# Altium PCB УШЯИ.411618.029Э.pcbdoc (part 1 of 6)
Units mil, origin at the board's own origin, x right, y up, seen from the top; angles counter-clockwise.
Board outline 13385.8 x 6692.9 mil, 4 copper layers (Top Layer, Supply, GND, Bottom Layer), stack 62.3 mil thick; 637 components, 474 nets, 1978 pads, 458 vias.
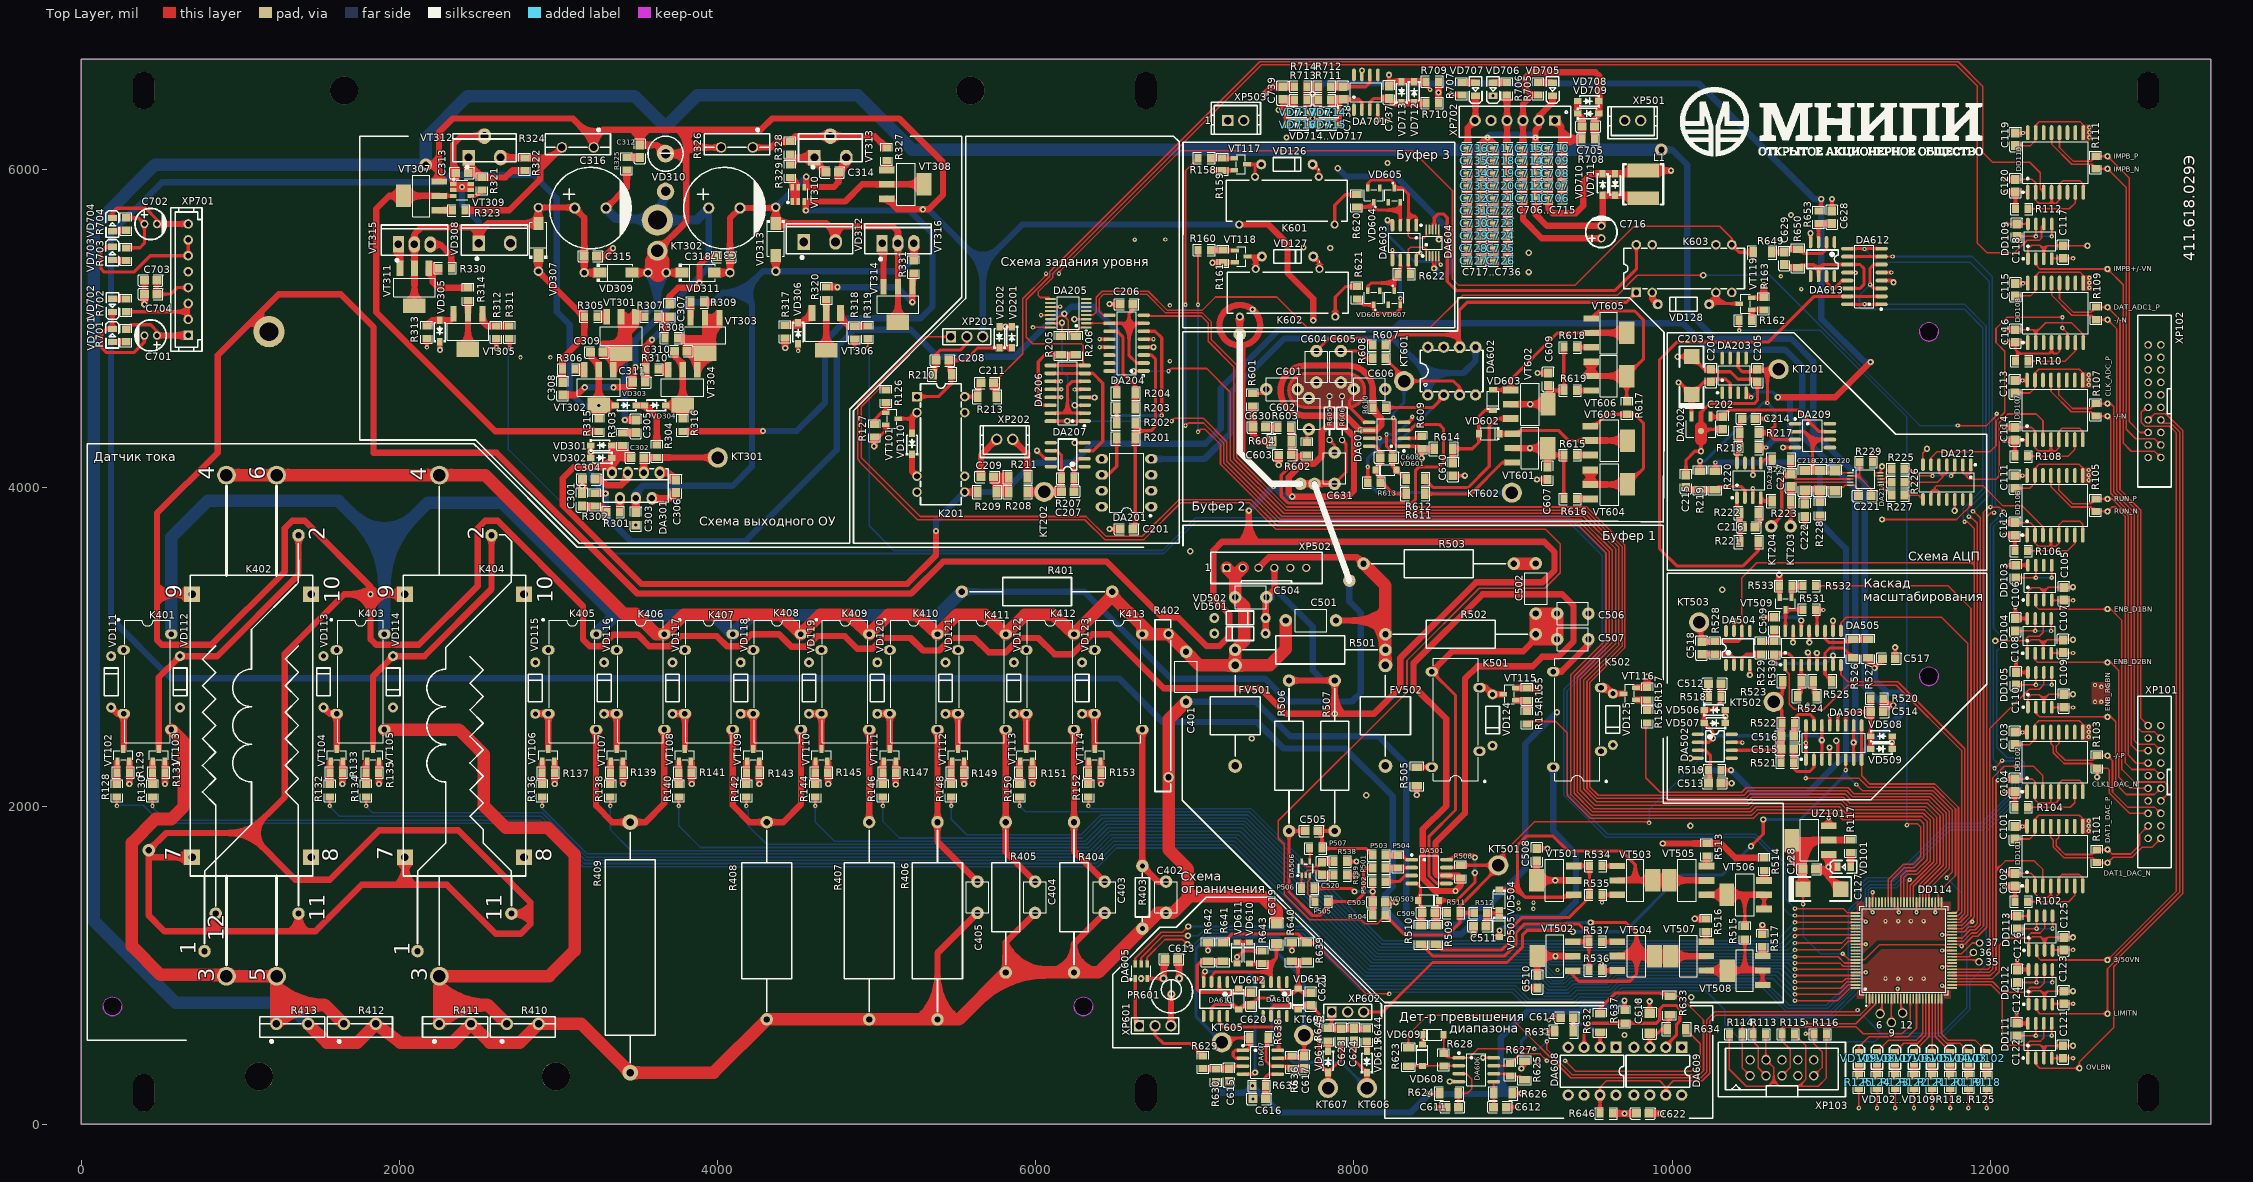
[diagram p0: Top Layer view]
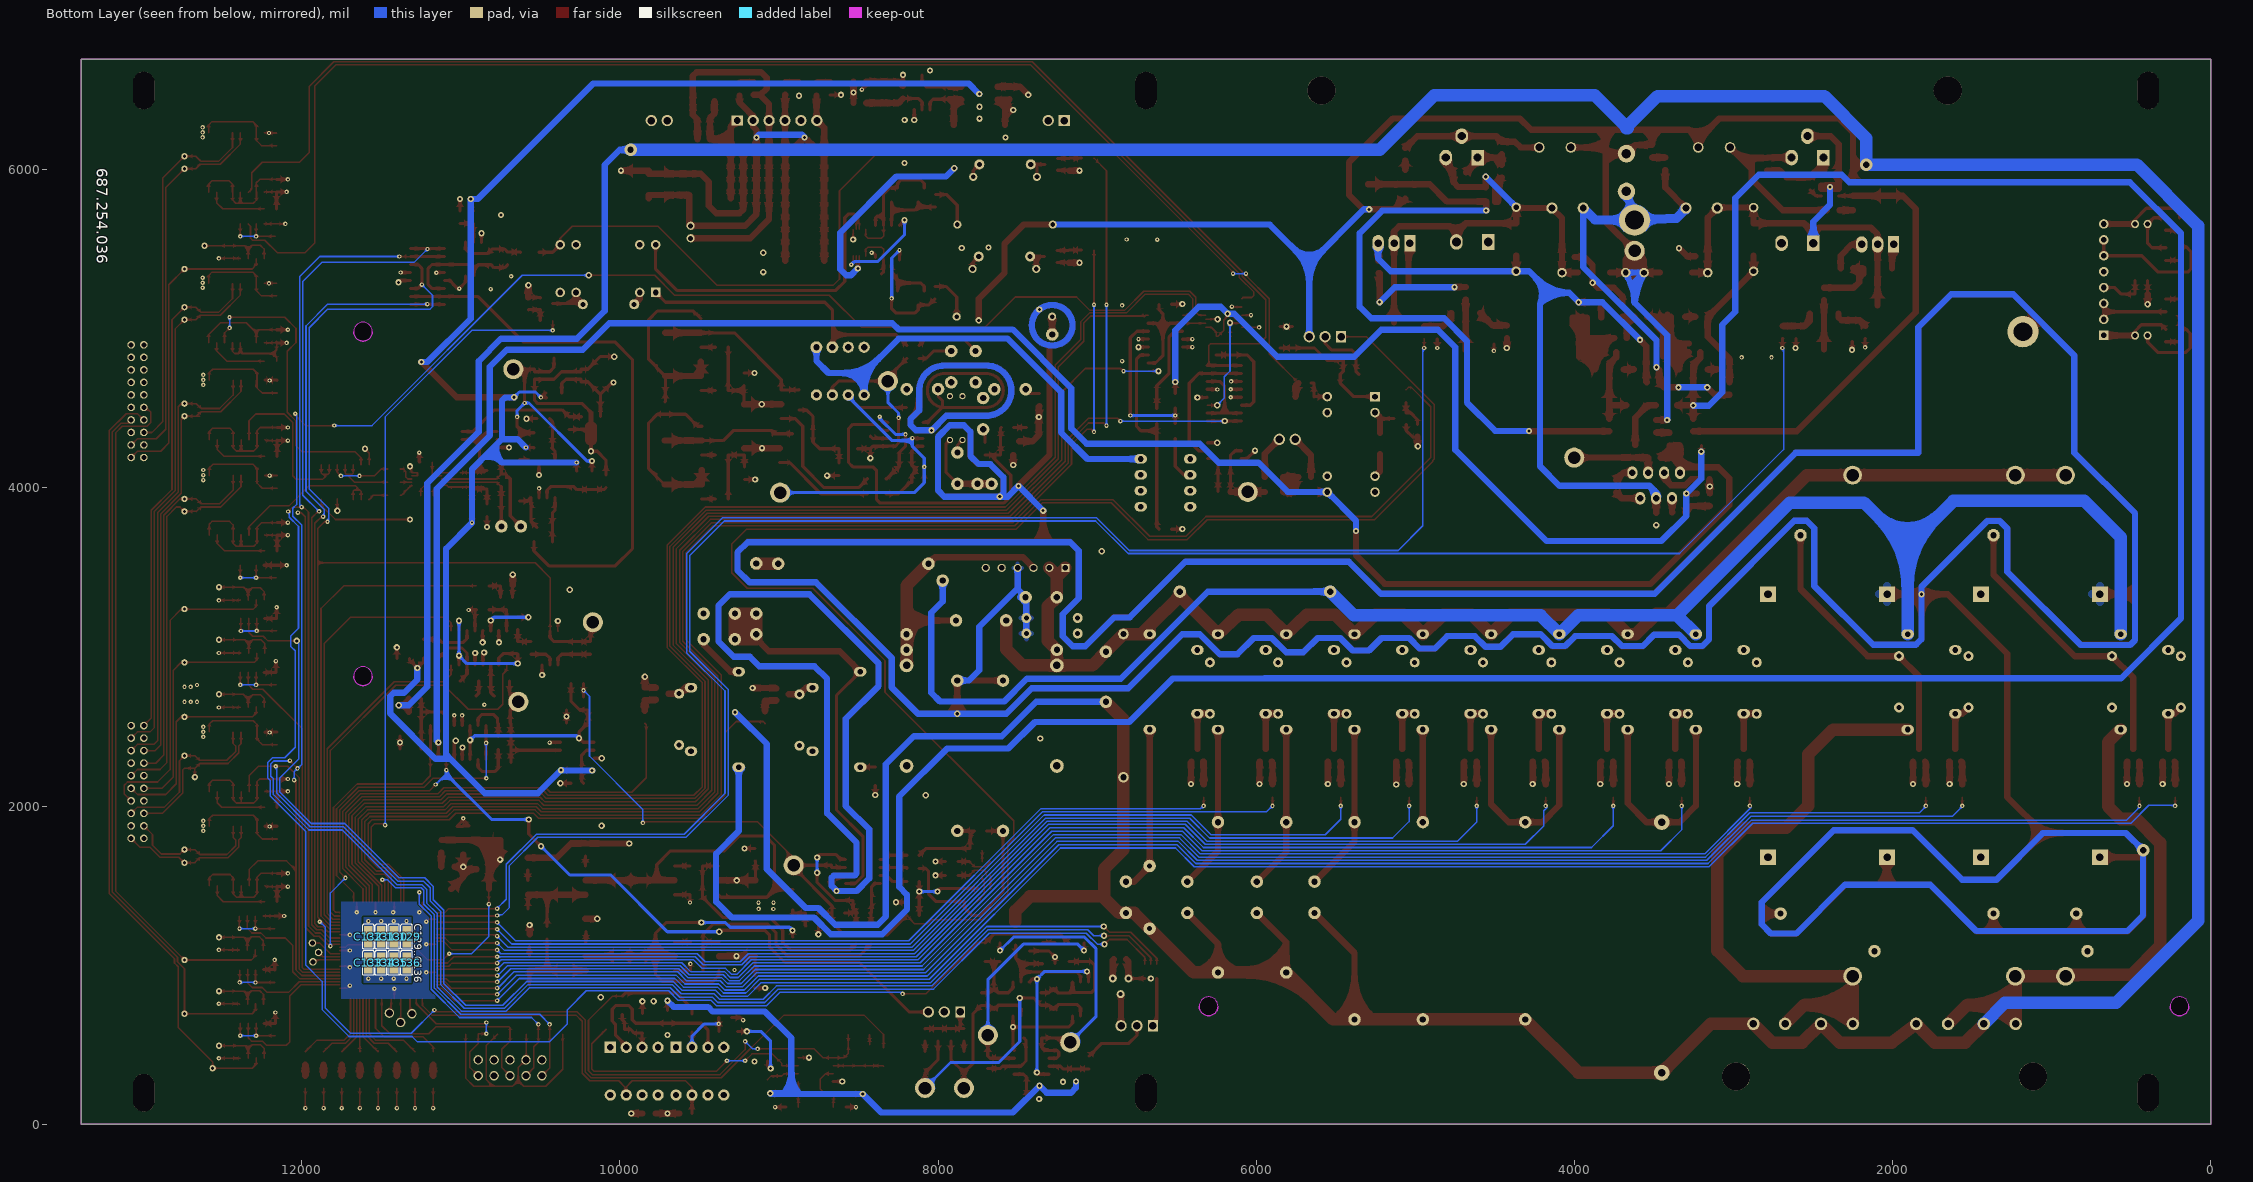
[diagram p1: Bottom Layer view, seen from below]
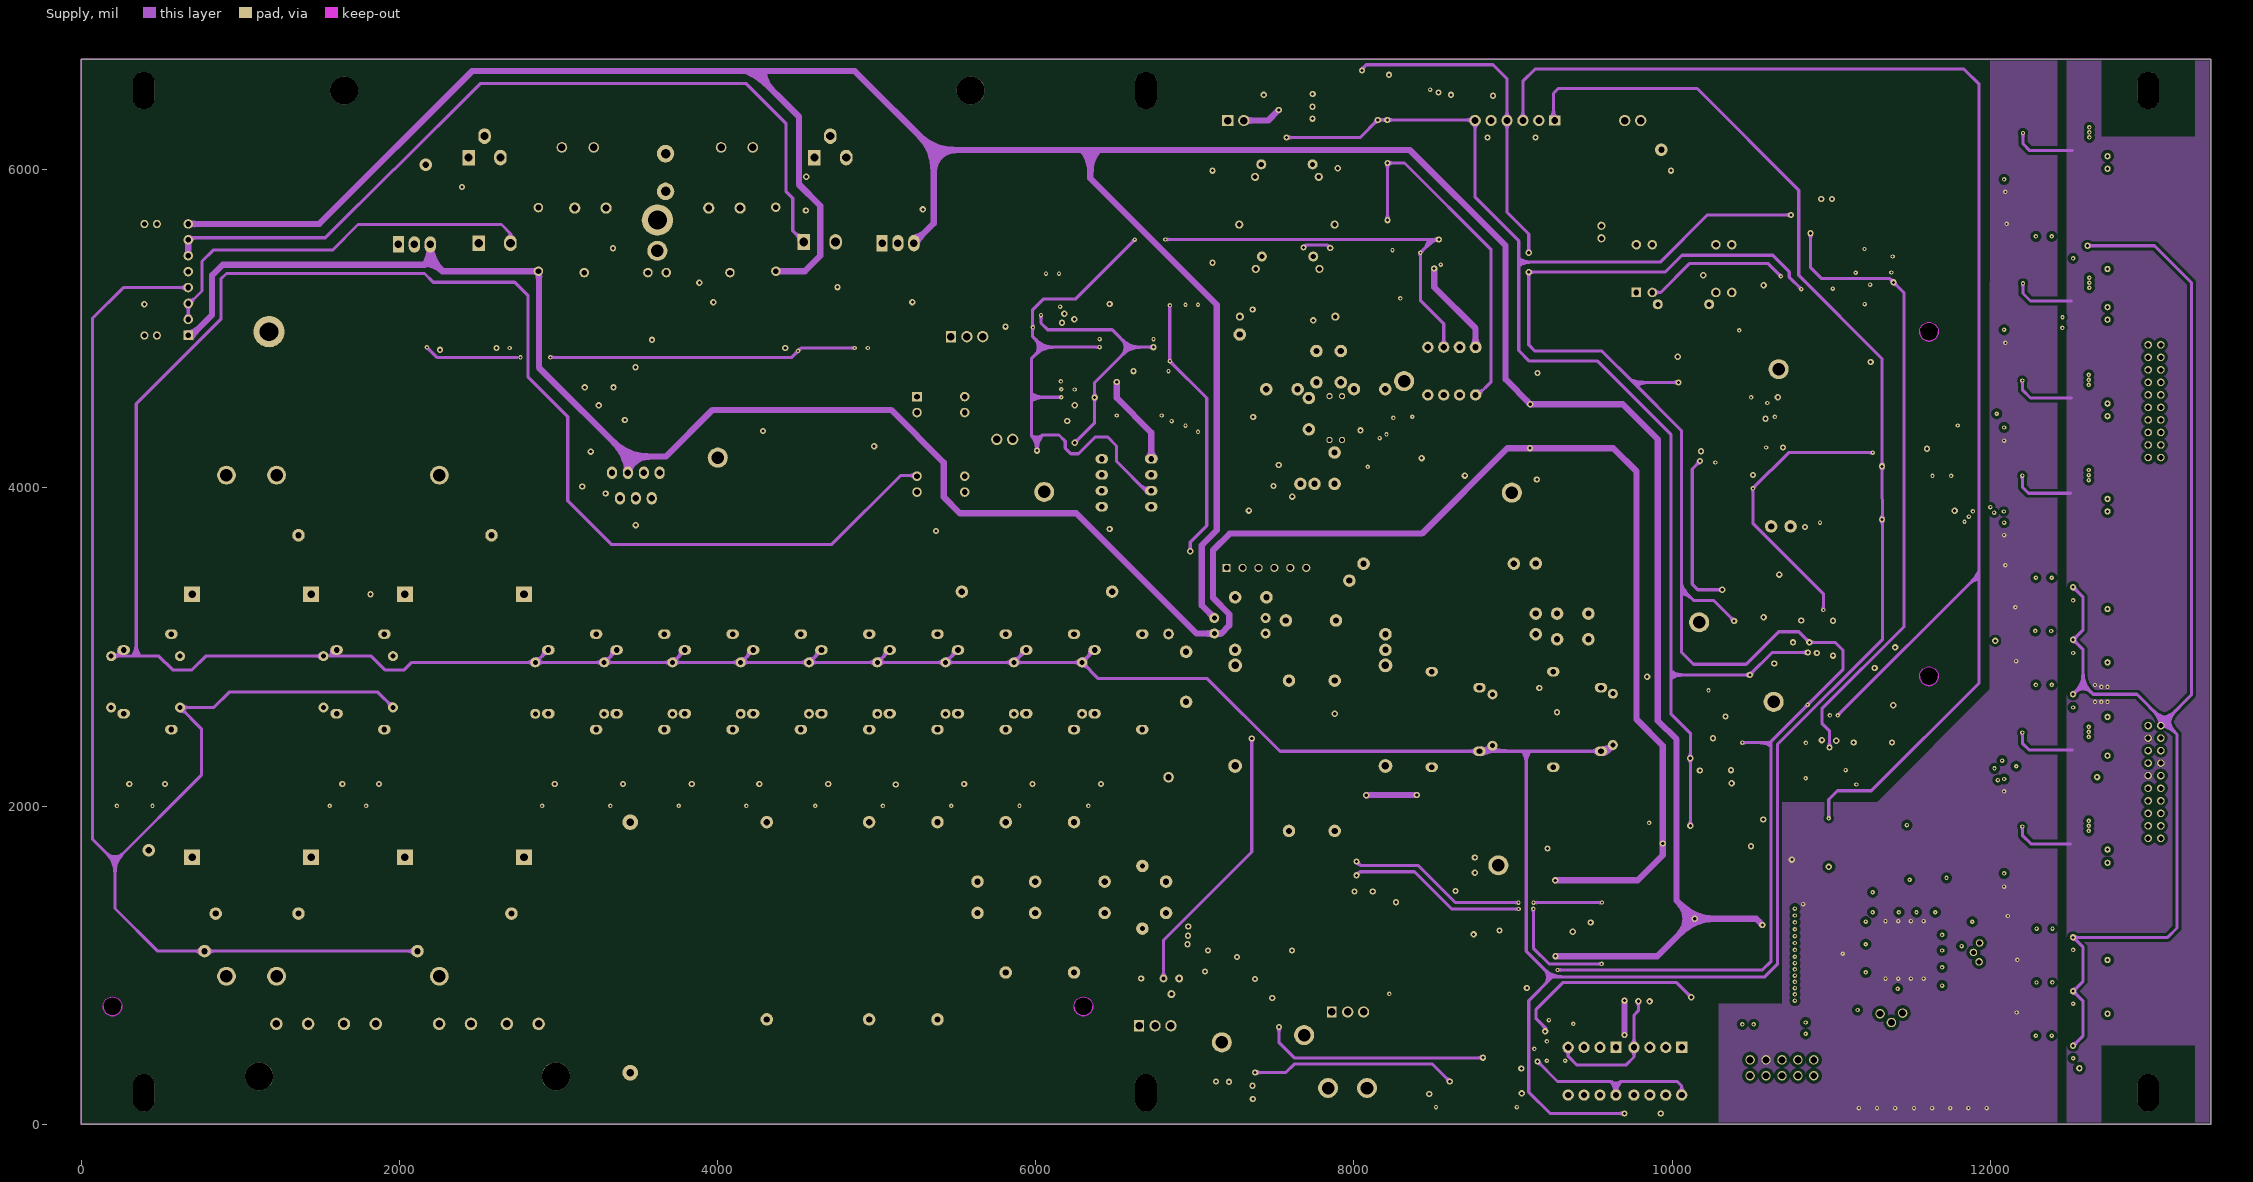
[diagram p2: Supply]
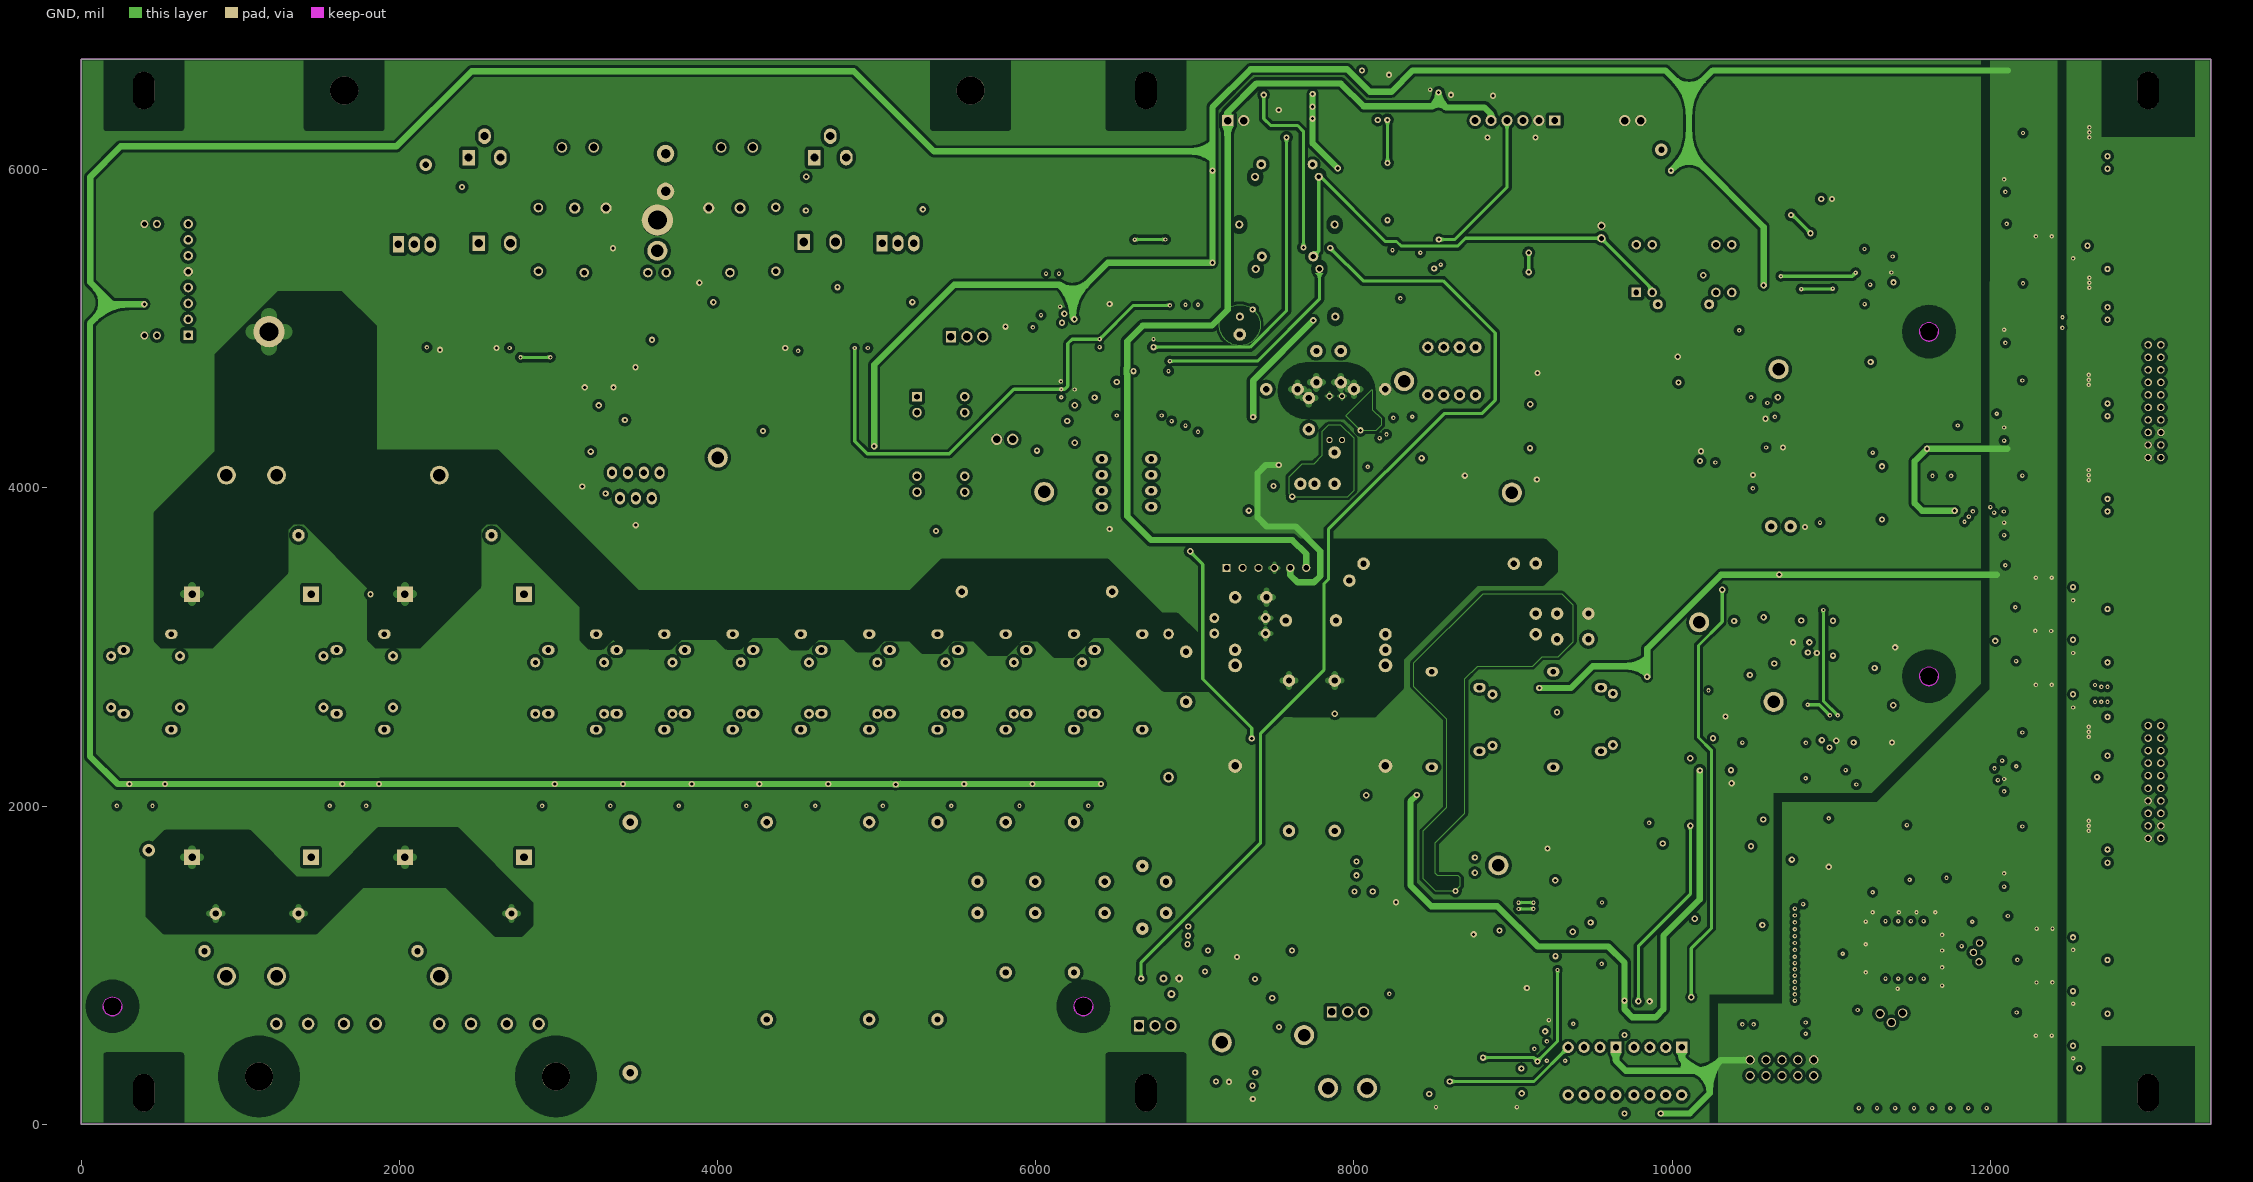
[diagram p3: GND]

## Layer stack, top to bottom
Top Solder Mask Layer: solder mask 0.4, Dk 3.3
Top Layer: signal copper 1.4
Dielectric1: surface 18.9, PP, Dk 4.5
Supply: signal copper 1.4
Dielectric2: surface 18.9, FR4, Dk 4.5
GND: signal copper 1.4
Dielectric3: surface 18.9, PP, Dk 4.5
Bottom Layer: signal copper 1.4
Bottom Solder Mask Layer: solder mask 0.4, Dk 3.3

## Board outline
0,1.2 13385.8,1.2 13385.8,6694.1 0,6694.1
cut-out: 11673.2,4981.5 11672.8,4974.6 11671.6,4967.9 11669.7,4961.3 11666.9,4955 11663.5,4949 11659.4,4943.5 11654.7,4938.5 11649.4,4934.1 11643.7,4930.4 11637.6,4927.3 11631.1,4924.9 11624.4,4923.3 11617.6,4922.5 11610.7,4922.5 11603.9,4923.3 11597.2,4924.9 11590.8,4927.3 11584.6,4930.4 11578.9,4934.1 11573.6,4938.5 11568.9,4943.5 11564.8,4949 11561.4,4955 11558.7,4961.3 11556.7,4967.9 11555.5,4974.6 11555.1,4981.5 11555.5,4988.4 11556.7,4995.1 11558.7,5001.7 11561.4,5008 11564.8,5013.9 11568.9,5019.5 11573.6,5024.5 11578.9,5028.9 11584.6,5032.6 11590.8,5035.7 11597.2,5038.1 11603.9,5039.7 11610.7,5040.5 11617.6,5040.5 11624.4,5039.7 11631.1,5038.1 11637.6,5035.7 11643.7,5032.6 11649.4,5028.9 11654.7,5024.5 11659.4,5019.5 11663.5,5013.9 11666.9,5008 11669.7,5001.7 11671.6,4995.1 11672.8,4988.4
cut-out: 11673.2,2816.1 11672.8,2809.3 11671.6,2802.5 11669.7,2795.9 11666.9,2789.6 11663.5,2783.7 11659.4,2778.2 11654.7,2773.2 11649.4,2768.8 11643.7,2765 11637.6,2761.9 11631.1,2759.6 11624.4,2758 11617.6,2757.2 11610.7,2757.2 11603.9,2758 11597.2,2759.6 11590.8,2761.9 11584.6,2765 11578.9,2768.8 11573.6,2773.2 11568.9,2778.2 11564.8,2783.7 11561.4,2789.6 11558.7,2795.9 11556.7,2802.5 11555.5,2809.3 11555.1,2816.1 11555.5,2823 11556.7,2829.8 11558.7,2836.3 11561.4,2842.6 11564.8,2848.6 11568.9,2854.1 11573.6,2859.1 11578.9,2863.5 11584.6,2867.3 11590.8,2870.4 11597.2,2872.7 11603.9,2874.3 11610.7,2875.1 11617.6,2875.1 11624.4,2874.3 11631.1,2872.7 11637.6,2870.4 11643.7,2867.3 11649.4,2863.5 11654.7,2859.1 11659.4,2854.1 11663.5,2848.6 11666.9,2842.6 11669.7,2836.3 11671.6,2829.8 11672.8,2823
cut-out: 255.9,741.3 255.5,734.5 254.3,727.7 252.3,721.1 249.6,714.8 246.2,708.9 242.1,703.4 237.4,698.4 232.1,694 226.4,690.2 220.2,687.1 213.8,684.8 207.1,683.2 200.3,682.4 193.4,682.4 186.6,683.2 179.9,684.8 173.5,687.1 167.3,690.2 161.6,694 156.3,698.4 151.6,703.4 147.5,708.9 144.1,714.8 141.4,721.1 139.4,727.7 138.2,734.5 137.8,741.3 138.2,748.2 139.4,755 141.4,761.5 144.1,767.8 147.5,773.8 151.6,779.3 156.3,784.3 161.6,788.7 167.3,792.5 173.5,795.6 179.9,797.9 186.6,799.5 193.4,800.3 200.3,800.3 207.1,799.5 213.8,797.9 220.2,795.6 226.4,792.5 232.1,788.7 237.4,784.3 242.1,779.3 246.2,773.8 249.6,767.8 252.3,761.5 254.3,755 255.5,748.2
cut-out: 6358.3,741.3 6357.9,734.5 6356.7,727.7 6354.7,721.1 6352,714.8 6348.6,708.9 6344.5,703.4 6339.7,698.4 6334.5,694 6328.7,690.2 6322.6,687.1 6316.1,684.8 6309.5,683.2 6302.6,682.4 6295.8,682.4 6289,683.2 6282.3,684.8 6275.8,687.1 6269.7,690.2 6263.9,694 6258.7,698.4 6254,703.4 6249.9,708.9 6246.4,714.8 6243.7,721.1 6241.7,727.7 6240.6,734.5 6240.2,741.3 6240.6,748.2 6241.7,755 6243.7,761.5 6246.4,767.8 6249.9,773.8 6254,779.3 6258.7,784.3 6263.9,788.7 6269.7,792.5 6275.8,795.6 6282.3,797.9 6289,799.5 6295.8,800.3 6302.6,800.3 6309.5,799.5 6316.1,797.9 6322.6,795.6 6328.7,792.5 6334.5,788.7 6339.7,784.3 6344.5,779.3 6348.6,773.8 6352,767.8 6354.7,761.5 6356.7,755 6357.9,748.2

## Design rules (kind name [scope] priority, off if disabled: settings)
BoardOutlineClearance Copper_gge239633(1)_1 [All] p1: gap=10 ignorepadtopadclearanceinfootprint=FALSE except(0: Arc-SplitContinuation Track-SplitContinuation SMDPad-SplitContinuation THPad-SplitContinuation Via-SplitContinuation Fill-SplitContinuation Poly-SplitContinuation Region-SplitContinuation Text-SplitContinuation)
BoardOutlineClearance Copper_gge_5 [All] p2: gap=10 ignorepadtopadclearanceinfootprint=FALSE except(0: Arc-SplitContinuation Track-SplitContinuation SMDPad-SplitContinuation THPad-SplitContinuation Via-SplitContinuation Fill-SplitContinuation Poly-SplitContinuation Region-SplitContinuation Text-SplitContinuation)
BoardOutlineClearance Copper_gge_4 [All] p3: gap=10 ignorepadtopadclearanceinfootprint=FALSE except(0: Arc-SplitContinuation Track-SplitContinuation SMDPad-SplitContinuation THPad-SplitContinuation Via-SplitContinuation Fill-SplitContinuation Poly-SplitContinuation Region-SplitContinuation Text-SplitContinuation)
BoardOutlineClearance Copper_gge470797(1)_1 [All] p4: gap=10 ignorepadtopadclearanceinfootprint=FALSE except(0: Arc-SplitContinuation Track-SplitContinuation SMDPad-SplitContinuation THPad-SplitContinuation Via-SplitContinuation Fill-SplitContinuation Poly-SplitContinuation Region-SplitContinuation Text-SplitContinuation)
BoardOutlineClearance Copper_gge_8 [All] p5: gap=10 ignorepadtopadclearanceinfootprint=FALSE except(0: Arc-SplitContinuation Track-SplitContinuation SMDPad-SplitContinuation THPad-SplitContinuation Via-SplitContinuation Fill-SplitContinuation Poly-SplitContinuation Region-SplitContinuation Text-SplitContinuation)
BoardOutlineClearance Copper_gge_7 [All] p6: gap=10 ignorepadtopadclearanceinfootprint=FALSE except(0: Arc-SplitContinuation Track-SplitContinuation SMDPad-SplitContinuation THPad-SplitContinuation Via-SplitContinuation Fill-SplitContinuation Poly-SplitContinuation Region-SplitContinuation Text-SplitContinuation)
BoardOutlineClearance Copper_gge_6 [All] p7: gap=10 ignorepadtopadclearanceinfootprint=FALSE except(0: Arc-SplitContinuation Track-SplitContinuation SMDPad-SplitContinuation THPad-SplitContinuation Via-SplitContinuation Fill-SplitContinuation Poly-SplitContinuation Region-SplitContinuation Text-SplitContinuation)
BoardOutlineClearance Copper_Default_1 [All] p8: gap=10 ignorepadtopadclearanceinfootprint=FALSE except(0: Arc-SplitContinuation Track-SplitContinuation SMDPad-SplitContinuation THPad-SplitContinuation Via-SplitContinuation Fill-SplitContinuation Poly-SplitContinuation Region-SplitContinuation Text-SplitContinuation)
BoardOutlineClearance Plane_Default_1 [All] p9: gap=10 ignorepadtopadclearanceinfootprint=FALSE except(0: Arc-SplitContinuation Track-SplitContinuation SMDPad-SplitContinuation THPad-SplitContinuation Via-SplitContinuation Fill-SplitContinuation Poly-SplitContinuation Region-SplitContinuation Text-SplitContinuation)
BoardOutlineClearance Default_1 [All] p10: gap=10 ignorepadtopadclearanceinfootprint=FALSE except(0: Arc-SplitContinuation Track-SplitContinuation SMDPad-SplitContinuation THPad-SplitContinuation Via-SplitContinuation Fill-SplitContinuation Poly-SplitContinuation Region-SplitContinuation Text-SplitContinuation)
BoardOutlineClearance Copper_gge_1 [All] p11: gap=10 ignorepadtopadclearanceinfootprint=FALSE except(0: Arc-SplitContinuation Track-SplitContinuation SMDPad-SplitContinuation THPad-SplitContinuation Via-SplitContinuation Fill-SplitContinuation Poly-SplitContinuation Region-SplitContinuation Text-SplitContinuation)
BoardOutlineClearance Copper_gge_3 [All] p12: gap=10 ignorepadtopadclearanceinfootprint=FALSE except(0: Arc-SplitContinuation Track-SplitContinuation SMDPad-SplitContinuation THPad-SplitContinuation Via-SplitContinuation Fill-SplitContinuation Poly-SplitContinuation Region-SplitContinuation Text-SplitContinuation)
BoardOutlineClearance Copper_gge_2 [All] p13: gap=10 ignorepadtopadclearanceinfootprint=FALSE except(0: Arc-SplitContinuation Track-SplitContinuation SMDPad-SplitContinuation THPad-SplitContinuation Via-SplitContinuation Fill-SplitContinuation Poly-SplitContinuation Region-SplitContinuation Text-SplitContinuation)
BoardOutlineClearance Copper_gge9500615235383426(1)_1 [All] p14: gap=10 ignorepadtopadclearanceinfootprint=FALSE except(0: Arc-SplitContinuation Track-SplitContinuation SMDPad-SplitContinuation THPad-SplitContinuation Via-SplitContinuation Fill-SplitContinuation Poly-SplitContinuation Region-SplitContinuation Text-SplitContinuation)
BoardOutlineClearance Copper_gge_11 [All] p15: gap=10 ignorepadtopadclearanceinfootprint=FALSE except(0: Arc-SplitContinuation Track-SplitContinuation SMDPad-SplitContinuation THPad-SplitContinuation Via-SplitContinuation Fill-SplitContinuation Poly-SplitContinuation Region-SplitContinuation Text-SplitContinuation)
BoardOutlineClearance Copper_gge237755(5)_1 [All] p16: gap=10 ignorepadtopadclearanceinfootprint=FALSE except(0: Arc-SplitContinuation Track-SplitContinuation SMDPad-SplitContinuation THPad-SplitContinuation Via-SplitContinuation Fill-SplitContinuation Poly-SplitContinuation Region-SplitContinuation Text-SplitContinuation)
BoardOutlineClearance Copper_gge237755(4)_1 [All] p17: gap=10 ignorepadtopadclearanceinfootprint=FALSE except(0: Arc-SplitContinuation Track-SplitContinuation SMDPad-SplitContinuation THPad-SplitContinuation Via-SplitContinuation Fill-SplitContinuation Poly-SplitContinuation Region-SplitContinuation Text-SplitContinuation)
BoardOutlineClearance Copper_gge_12 [All] p18: gap=10 ignorepadtopadclearanceinfootprint=FALSE except(0: Arc-SplitContinuation Track-SplitContinuation SMDPad-SplitContinuation THPad-SplitContinuation Via-SplitContinuation Fill-SplitContinuation Poly-SplitContinuation Region-SplitContinuation Text-SplitContinuation)
BoardOutlineClearance otherClearance_1 [All] p19: gap=10 ignorepadtopadclearanceinfootprint=FALSE except(0: Arc-SplitContinuation Track-SplitContinuation SMDPad-SplitContinuation THPad-SplitContinuation Via-SplitContinuation Fill-SplitContinuation Poly-SplitContinuation Region-SplitContinuation Text-SplitContinuation)
BoardOutlineClearance Copper_gge_14 [All] p20: gap=10 ignorepadtopadclearanceinfootprint=FALSE except(0: Arc-SplitContinuation Track-SplitContinuation SMDPad-SplitContinuation THPad-SplitContinuation Via-SplitContinuation Fill-SplitContinuation Poly-SplitContinuation Region-SplitContinuation Text-SplitContinuation)
BoardOutlineClearance Copper_gge_13 [All] p21: gap=10 ignorepadtopadclearanceinfootprint=FALSE except(0: Arc-SplitContinuation Track-SplitContinuation SMDPad-SplitContinuation THPad-SplitContinuation Via-SplitContinuation Fill-SplitContinuation Poly-SplitContinuation Region-SplitContinuation Text-SplitContinuation)
BoardOutlineClearance Copper_gge507818(2)_1 [All] p22: gap=10 ignorepadtopadclearanceinfootprint=FALSE except(0: Arc-SplitContinuation Track-SplitContinuation SMDPad-SplitContinuation THPad-SplitContinuation Via-SplitContinuation Fill-SplitContinuation Poly-SplitContinuation Region-SplitContinuation Text-SplitContinuation)
BoardOutlineClearance Copper_gge507818(1)_1 [All] p23: gap=10 ignorepadtopadclearanceinfootprint=FALSE except(0: Arc-SplitContinuation Track-SplitContinuation SMDPad-SplitContinuation THPad-SplitContinuation Via-SplitContinuation Fill-SplitContinuation Poly-SplitContinuation Region-SplitContinuation Text-SplitContinuation)
BoardOutlineClearance Copper_gge_9 [All] p24: gap=10 ignorepadtopadclearanceinfootprint=FALSE except(0: Arc-SplitContinuation Track-SplitContinuation SMDPad-SplitContinuation THPad-SplitContinuation Via-SplitContinuation Fill-SplitContinuation Poly-SplitContinuation Region-SplitContinuation Text-SplitContinuation)
BoardOutlineClearance Copper_gge_10 [All] p25: gap=10 ignorepadtopadclearanceinfootprint=FALSE except(0: Arc-SplitContinuation Track-SplitContinuation SMDPad-SplitContinuation THPad-SplitContinuation Via-SplitContinuation Fill-SplitContinuation Poly-SplitContinuation Region-SplitContinuation Text-SplitContinuation)
BoardOutlineClearance Copper_gge237755(3)_1 [All] p26: gap=10 ignorepadtopadclearanceinfootprint=FALSE except(0: Arc-SplitContinuation Track-SplitContinuation SMDPad-SplitContinuation THPad-SplitContinuation Via-SplitContinuation Fill-SplitContinuation Poly-SplitContinuation Region-SplitContinuation Text-SplitContinuation)
BoardOutlineClearance Copper_gge237755(2)_1 [All] p27: gap=10 ignorepadtopadclearanceinfootprint=FALSE except(0: Arc-SplitContinuation Track-SplitContinuation SMDPad-SplitContinuation THPad-SplitContinuation Via-SplitContinuation Fill-SplitContinuation Poly-SplitContinuation Region-SplitContinuation Text-SplitContinuation)
BoardOutlineClearance Copper_gge237755(1)_1 [All] p28: gap=10 ignorepadtopadclearanceinfootprint=FALSE except(0: Arc-SplitContinuation Track-SplitContinuation SMDPad-SplitContinuation THPad-SplitContinuation Via-SplitContinuation Fill-SplitContinuation Poly-SplitContinuation Region-SplitContinuation Text-SplitContinuation)
Clearance Copper_gge239633(1) [All] p1: gap=7 ignorepadtopadclearanceinfootprint=FALSE
Clearance Copper_gge1161227 [All] p2: gap=7 ignorepadtopadclearanceinfootprint=FALSE
Clearance Copper_gge239633 [All] p3: gap=7 ignorepadtopadclearanceinfootprint=FALSE
Clearance Copper_gge470797(1) [All] p4: gap=7 ignorepadtopadclearanceinfootprint=FALSE
Clearance Copper_gge485192 [All] p5: gap=7 ignorepadtopadclearanceinfootprint=FALSE
Clearance Copper_gge480458 [All] p6: gap=7 ignorepadtopadclearanceinfootprint=FALSE
Clearance Copper_gge480443 [All] p7: gap=7 ignorepadtopadclearanceinfootprint=FALSE
Clearance Copper_Default [All] p8: gap=7 ignorepadtopadclearanceinfootprint=FALSE
Clearance Plane_Default [All] p9: gap=7 ignorepadtopadclearanceinfootprint=FALSE
Clearance Default [All] p10: gap=7 ignorepadtopadclearanceinfootprint=FALSE
Clearance Copper_gge9500615235383426 [All] p11: gap=7 ignorepadtopadclearanceinfootprint=FALSE
Clearance Copper_gge470797 [All] p12: gap=7 ignorepadtopadclearanceinfootprint=FALSE
Clearance Copper_gge461890 [All] p13: gap=7 ignorepadtopadclearanceinfootprint=FALSE
Clearance Copper_gge9500615235383426(1) [All] p14: gap=7 ignorepadtopadclearanceinfootprint=FALSE
Clearance Copper_gge419273 [All] p15: gap=7 ignorepadtopadclearanceinfootprint=FALSE
Clearance Copper_gge237755(5) [All] p16: gap=7 ignorepadtopadclearanceinfootprint=FALSE
Clearance Copper_gge237755(4) [All] p17: gap=7 ignorepadtopadclearanceinfootprint=FALSE
Clearance Copper_gge430710 [All] p18: gap=7 ignorepadtopadclearanceinfootprint=FALSE
Clearance otherClearance [All] p19: gap=7 ignorepadtopadclearanceinfootprint=FALSE
Clearance Copper_gge466345 [All] p20: gap=7 ignorepadtopadclearanceinfootprint=FALSE
Clearance Copper_gge464113 [All] p21: gap=7 ignorepadtopadclearanceinfootprint=FALSE
Clearance Copper_gge507818(2) [All] p22: gap=7 ignorepadtopadclearanceinfootprint=FALSE
Clearance Copper_gge507818(1) [All] p23: gap=7 ignorepadtopadclearanceinfootprint=FALSE
Clearance Copper_gge507818 [All] p24: gap=7 ignorepadtopadclearanceinfootprint=FALSE
Clearance Copper_gge237755 [All] p25: gap=7 ignorepadtopadclearanceinfootprint=FALSE
Clearance Copper_gge237755(3) [All] p26: gap=7 ignorepadtopadclearanceinfootprint=FALSE
Clearance Copper_gge237755(2) [All] p27: gap=7 ignorepadtopadclearanceinfootprint=FALSE
Clearance Copper_gge237755(1) [All] p28: gap=7 ignorepadtopadclearanceinfootprint=FALSE
DiffPairsRouting differentialPair [All] p1: maxlimit=6 minlimit=6 mostfreqgap=6 toplayer_minwidth=5 toplayer_maxwidth=100 toplayer_prefwidth=10 midlayer1_minwidth=5 midlayer1_maxwidth=100 midlayer1_prefwidth=10 midlayer2_minwidth=5 midlayer2_maxwidth=100 midlayer2_prefwidth=10 bottomlayer_minwidth=5 bottomlayer_maxwidth=100 bottomlayer_prefwidth=10 maxuncoupledlength=10
PasteMaskExpansion Common [All] p1: expansion=0
PlaneConnect Default_4 [All] p1: planeconnectstyle=Relief reliefexpansion=20 reliefentries=4 reliefconductorwidth=0 reliefairgap=10
PolygonConnect gge470797(1) [All] p1: connectstyle=Relief reliefconductorwidth=0 reliefentries=4 polygonreliefangle="90 Angle" airgapwidth=1
PolygonConnect gge239633(1) [All] p2: connectstyle=Relief reliefconductorwidth=0 reliefentries=4 polygonreliefangle="90 Angle" airgapwidth=1
PolygonConnect gge1161227 [All] p3: connectstyle=Relief reliefconductorwidth=0 reliefentries=4 polygonreliefangle="90 Angle" airgapwidth=1
PolygonConnect gge485192 [All] p4: connectstyle=Relief reliefconductorwidth=0 reliefentries=4 polygonreliefangle="90 Angle" airgapwidth=1
PolygonConnect gge480458 [All] p5: connectstyle=Relief reliefconductorwidth=0 reliefentries=4 polygonreliefangle="90 Angle" airgapwidth=1
PolygonConnect gge480443 [All] p6: connectstyle=Relief reliefconductorwidth=0 reliefentries=4 polygonreliefangle="90 Angle" airgapwidth=1
PolygonConnect gge9500615235383426(1) [All] p7: connectstyle=Relief reliefconductorwidth=0 reliefentries=4 polygonreliefangle="90 Angle" airgapwidth=1
PolygonConnect gge9500615235383426 [All] p8: connectstyle=Relief reliefconductorwidth=0 reliefentries=4 polygonreliefangle="90 Angle" airgapwidth=1
PolygonConnect Default_5 [All] p9: connectstyle=Relief reliefconductorwidth=0 reliefentries=4 polygonreliefangle="90 Angle" airgapwidth=1
PolygonConnect gge239633 [All] p10: connectstyle=Relief reliefconductorwidth=0 reliefentries=4 polygonreliefangle="90 Angle" airgapwidth=1
PolygonConnect gge470797 [All] p11: connectstyle=Relief reliefconductorwidth=0 reliefentries=4 polygonreliefangle="90 Angle" airgapwidth=1
PolygonConnect gge461890 [All] p12: connectstyle=Relief reliefconductorwidth=0 reliefentries=4 polygonreliefangle="90 Angle" airgapwidth=1
PolygonConnect gge507818 [All] p13: connectstyle=Relief reliefconductorwidth=0 reliefentries=4 polygonreliefangle="90 Angle" airgapwidth=1
PolygonConnect gge419273 [All] p14: connectstyle=Relief reliefconductorwidth=0 reliefentries=4 polygonreliefangle="90 Angle" airgapwidth=1
PolygonConnect gge237755(5) [All] p15: connectstyle=Relief reliefconductorwidth=0 reliefentries=4 polygonreliefangle="90 Angle" airgapwidth=1
PolygonConnect gge237755(4) [All] p16: connectstyle=Relief reliefconductorwidth=0 reliefentries=4 polygonreliefangle="90 Angle" airgapwidth=1
PolygonConnect gge466345 [All] p17: connectstyle=Relief reliefconductorwidth=0 reliefentries=4 polygonreliefangle="90 Angle" airgapwidth=1
PolygonConnect gge464113 [All] p18: connectstyle=Relief reliefconductorwidth=0 reliefentries=4 polygonreliefangle="90 Angle" airgapwidth=1
PolygonConnect gge430710 [All] p19: connectstyle=Relief reliefconductorwidth=0 reliefentries=4 polygonreliefangle="90 Angle" airgapwidth=1
PolygonConnect gge237755 [All] p20: connectstyle=Relief reliefconductorwidth=0 reliefentries=4 polygonreliefangle="90 Angle" airgapwidth=1
PolygonConnect gge507818(2) [All] p21: connectstyle=Relief reliefconductorwidth=0 reliefentries=4 polygonreliefangle="90 Angle" airgapwidth=1
PolygonConnect gge507818(1) [All] p22: connectstyle=Relief reliefconductorwidth=0 reliefentries=4 polygonreliefangle="90 Angle" airgapwidth=1
PolygonConnect gge237755(3) [All] p23: connectstyle=Relief reliefconductorwidth=0 reliefentries=4 polygonreliefangle="90 Angle" airgapwidth=1
PolygonConnect gge237755(2) [All] p24: connectstyle=Relief reliefconductorwidth=0 reliefentries=4 polygonreliefangle="90 Angle" airgapwidth=1
PolygonConnect gge237755(1) [All] p25: connectstyle=Relief reliefconductorwidth=0 reliefentries=4 polygonreliefangle="90 Angle" airgapwidth=1
RoutingVias Default_3 [All] p1: holewidth=11.81 width=11.81 viastyle="Through Hole" minholewidth=11.81 minwidth=11.81 maxholewidth=2362 maxwidth=2362
SolderMaskExpansion Common_2 [IsVia] p1: expansion=-1000 istentingtop=FALSE useseparateexpansions=TRUE expansionbottom=-1000 istentingbottom=FALSE
SolderMaskExpansion Common_1 [All] p2: expansion=2 istentingtop=FALSE useseparateexpansions=TRUE expansionbottom=2 istentingbottom=FALSE
Width Default_2 [All] p1: maxlimit=1000 minlimit=10 preferedwidth=10
27 further rules are at their usual default settings.

## Components (designator, comment, footprint, x,y, rotation, side; value= is the part's Value field where it differs from the comment)
C101 "Конденсатор SMD 100нФ 100В X7R 10% [0805]" C0805#1 12153.5,1832.2 r90 top locked
C102 "Конденсатор SMD 100нФ 100В X7R 10% [0805]" C0805#1 12153.5,1536.9 r270 top locked
C103 "Конденсатор SMD 100нФ 100В X7R 10% [0805]" C0805#1 12153.5,2425.7 r90 top locked
C104 "Конденсатор SMD 100нФ 100В X7R 10% [0805]" C0805#1 12153.5,2130.4 r270 top locked
C105 "Конденсатор SMD 100нФ 100В X7R 10% [0805]" C0805#1 12460.8,3334.4 r90 top locked
C106 "Конденсатор SMD 100нФ 100В X7R 10% [0805]" C0805#1 12160.8,3474.4 r90 top locked
C107 "Конденсатор SMD 100нФ 100В X7R 10% [0805]" C0805#2 12456.9,3004.2 r90 top locked
C108 "Конденсатор SMD 100нФ 100В X7R 10% [0805]" C0805#1 12156.9,3140.1 r90 top locked
C109 "Конденсатор SMD 100нФ 100В X7R 10% [0805]" C0805#2 12460.9,2660.6 r90 top locked
C110 "Конденсатор SMD 100нФ 100В X7R 10% [0805]" C0805#2 12160.9,2800.6 r90 top locked
C111 "Конденсатор SMD 100нФ 100В X7R 10% [0805]" C0805#1 12153.5,4036.9 r90 top locked
C112 "Конденсатор SMD 100нФ 100В X7R 10% [0805]" C0805#3 12153.5,3741.6 r270 top locked
C113 "Конденсатор SMD 100нФ 100В X7R 10% [0805]" C0805#2 12153.5,4635.3 r90 top locked
C114 "Конденсатор SMD 100нФ 100В X7R 10% [0805]" C0805#3 12153.5,4340 r270 top locked
C115 "Конденсатор SMD 100нФ 100В X7R 10% [0805]" C0805#3 12157.5,5245.6 r90 top locked
C116 "Конденсатор SMD 100нФ 100В X7R 10% [0805]" C0805#3 12157.5,4954.2 r270 top locked
C117 "Конденсатор SMD 100нФ 100В X7R 10% [0805]" C0805#1 12456.7,5481.8 r90 top locked
C118 "Конденсатор SMD 100нФ 100В X7R 10% [0805]" C0805#3 12165.3,5619.6 r90 top locked
C119 "Конденсатор SMD 100нФ 100В X7R 10% [0805]" C0805#2 12157.5,6190.4 r90 top locked
C120 "Конденсатор SMD 100нФ 100В X7R 10% [0805]" C0805#1 12157.5,5899.1 r270 top locked
C121 "Конденсатор SMD 100нФ 100В X7R 10% [0805]" C0805#1 12456.5,454.1 r90 top locked
C122 "Конденсатор SMD 100нФ 100В X7R 10% [0805]" C0805#1 12165.1,595.8 r90 top locked
C123 "Конденсатор SMD 100нФ 100В X7R 10% [0805]" C0805#3 12460.4,796.6 r90 top locked
C124 "Конденсатор SMD 100нФ 100В X7R 10% [0805]" C0805#1 12169,930.4 r90 top locked
C125 "Конденсатор SMD 100нФ 100В X7R 10% [0805]" C0805#1 12461.3,1134.7 r90 top locked
C126 "Конденсатор SMD 100нФ 100В X7R 10% [0805]" C0805#3 12169.9,1268.6 r90 top locked
C127 "TECAP, 100мкФ, 10В, тип C" CASE-C_6032#1 10940.9,1477.9 r180 top locked
C128 "Конденсатор SMD 10мкФ 100В X7R 10% [0805]" C0805#3 10860.9,1602.9 r180 top locked
C129 "Конденсатор SMD 100нФ 100В X7R 10% [0805]" C0805#1 11340.6,1178.5 r90 bottom locked
C130 "Конденсатор SMD 100нФ 100В X7R 10% [0805]" C0805#1 11420.6,1178.5 r90 bottom locked
C131 "Конденсатор SMD 100нФ 100В X7R 10% [0805]" C0805#1 11500.6,1178.5 r90 bottom locked
C132 "Конденсатор SMD 100нФ 100В X7R 10% [0805]" C0805#1 11580.6,1178.5 r90 bottom locked
C133 "Конденсатор SMD 100нФ 100В X7R 10% [0805]" C0805#1 11580.6,1013.5 r270 bottom locked
C134 "Конденсатор SMD 100нФ 100В X7R 10% [0805]" C0805#1 11500.6,1013.5 r270 bottom locked
C135 "Конденсатор SMD 100нФ 100В X7R 10% [0805]" C0805#1 11420.6,1013.5 r270 bottom locked
C136 "Конденсатор SMD 100нФ 100В X7R 10% [0805]" C0805#1 11340.6,1013.5 r270 bottom locked
C201 "Конденсатор SMD 100нФ 100В X7R 10% [0805]" C0805#3 6570.8,3739.9 r180 top locked
C202 "Конденсатор SMD 0.33мкФ 100В X7R 10% [0805]" C0805#2 10318.9,4407 r270 top locked
C203 "TECAP, 4.7мкФ, 35В, тип C" CASE-C_6032#2 10122,4706.2 r270 top locked
C204 "Конденсатор SMD 0.33мкФ 100В X7R 10% [0805]" C0805#1 10244.1,4706.2 r90 top locked
C205 "Конденсатор SMD 100нФ 100В X7R 10% [0805]" C0805#1 10535.4,4706.2 r270 top locked
C206 "Конденсатор SMD 100нФ 100В X7R 10% [0805]" C0805#2 6570.8,5153.3 r0 top locked
C207 "Конденсатор SMD 10пФ 100В X7R 10% [0805]" C0805#2 6200.8,3976.2 r180 top locked
C208 "Конденсатор SMD 33пФ 100В X7R 10% [0805]" C0805#3 5413.4,4800.4 r0 top locked
C209 "Конденсатор SMD 5600пФ 100В X7R 10% [0805]" C0805#3 5694.9,4068.5 r0 top locked
C211 "Конденсатор SMD 22пФ 100В X7R 10% [0805]" C0805#2 5694.9,4659 r180 top locked
C214 "Конденсатор SMD 100нФ 100В X7R 10% [0805]" C0805#1 10480.3,4434.5 r0 top locked
C215 "Конденсатор SMD 100нФ 100В X7R 10% [0805]" C0805#2 10086.6,4040.8 r90 top locked
C216 "Конденсатор SMD 680пФ 100В X7R 10% [0805]" C0805#1 10482.2,3751.4 r0 top locked
C217 "Конденсатор SMD 9100пФ 100В X7R 10% [0805]" C0805#2 10745.1,4046.7 r270 top locked
C218 "Конденсатор SMD 1мкФ 100В X7R 10% [1206]" C1206 10834.6,4046.7 r270 top locked
C219 "Конденсатор SMD 1мкФ 100В X7R 10% [1206]" C1206 10929.1,4046.7 r270 top locked
C220 "Конденсатор SMD 1мкФ 100В X7R 10% [1206]" C1206 11023.6,4044.8 r270 top locked
C221 "Конденсатор SMD 2,2мкФ 100В X7R 10% [0805]" C0805#1 11210.6,3949.1 r0 top locked
C222 "Конденсатор SMD 1500пФ 100В X7R 10% [0805]" C0805#2 10834.6,3859.7 r90 top locked (schematic designator C220)
C301 "Конденсатор SMD 1мкФ 100В X7R 10% [0805]" C0805#2 3148.2,3924.5 r270 top locked
C302 "Конденсатор SMD 33пФ 100В X7R 10% [0805]" C0805#3 3496.6,4189 r180 top locked
C303 "Конденсатор SMD 68нФ 100В X7R 10% [0805]" C0805#1 3486.3,3804.6 r90 top locked
C304 "Конденсатор SMD 68нФ 100В X7R 10% [0805]" C0805#2 3191.1,4053.2 r0 top locked
C305 "Конденсатор SMD 10пФ 100В X7R 10% [0805]" C0805#2 3485.6,4386.7 r270 top locked
C306 "Конденсатор SMD 10пФ 100В X7R 10% [0805]" C0805#1 3738.8,4009.5 r90 top locked
C307 "Конденсатор SMD 68нФ 250В X7R 10% [0805]" C0805#1 3698.2,5115 r270 top locked
C308 "Конденсатор SMD 68нФ 250В X7R 10% [0805]" C0805#1 3025.7,4623.5 r270 top locked
C309 "Конденсатор SMD 10пФ 100В X7R 10% [0805]" C0805#2 3241.5,4851.2 r0 top locked
C310 "Конденсатор SMD 10пФ 100В X7R 10% [0805]" C0805#1 3769.1,4859.1 r0 top locked
C311 "Конденсатор SMD 68нФ 250В X7R 10% [0805]" C0805#1 3506,4662.9 r180 top locked
C312 "Конденсатор SMD 10пФ 100В X7R 10% [0805]" C0805#3 3511.8,6115.6 r270 top locked
C313 "Конденсатор SMD 10пФ 100В X7R 10% [0805]" C0805#1 2393.7,5978.6 r0 top locked
C314 "Конденсатор SMD 10пФ 100В X7R 10% [0805]" C0805#1 4720.5,5982.6 r180 top locked
C315 "Конденсатор SMD 10пФ 100В X7R 10% [0805]" C0805#1 3200.8,5455 r0 top locked
C316 "ECAP (К50-35), 220мкФ, 100В, 105°C, 13x25, p:5мм" CAP-TH_BD13.0-P5.00-D0.6-FD 3200.8,5758.1 r0 top locked
C317 "ECAP (К50-35), 220мкФ, 100В, 105°C, 13x25, p:5мм" CAP-TH_BD13.0-P5.00-D0.6-FD 4043.3,5758.1 r0 top
C318 "Конденсатор SMD 10пФ 100В X7R 10% [0805]" C0805#1 4039.4,5451.1 r180 top locked
C401 "Конденсатор К10-17Б М47 33пФ NP0 5% [DIP]" "Конденсатор К10-17Б М47 X.X.xФ  NP0 5% [DIP 8мм]" 6944.9,2812.2 r90 top locked
C402 "Конденсатор К10-17Б М47 33пФ NP0 5% [DIP]" "Конденсатор К10-17Б М47 X.X.xФ  NP0 5% [DIP 5мм]" 6818.9,1426.4 r270 top locked
C403 "Конденсатор К10-17Б М47 33пФ NP0 5% [DIP]" "Конденсатор К10-17Б М47 X.X.xФ  NP0 5% [DIP 5мм]" 6433.1,1426.4 r270 top locked
C404 "Конденсатор К10-17Б М47 33пФ NP0 5% [DIP]" "Конденсатор К10-17Б М47 X.X.xФ  NP0 5% [DIP 5мм]" 5996.1,1426.4 r270 top locked
C405 "Конденсатор К10-17Б М47 33пФ NP0 5% [DIP]" "Конденсатор К10-17Б М47 X.X.xФ  NP0 5% [DIP 5мм]" 5633.8,1426.4 r270 top locked
C501 "Конденсатор К10-17Б М47 47пФ  NP0 5% [DIP]" "Конденсатор К10-17Б М47 X.X.xФ  NP0 5% [DIP 8мм]" 7729.4,3166.4 r0 top locked
C502 "Конденсатор К10-17Б М47 47пФ  NP0 5% [DIP]" "Конденсатор К10-17Б М47 X.X.xФ  NP0 5% [DIP 8мм]" 9142.8,3367.2 r270 top locked
C503 "Конденсатор SMD 10пФ 100В X7R 10% [0805]" C0805#3 8157.5,1395.2 r0 top locked
C504 "Конденсатор К10-17Б М47 0,022мкФ  NP0 5% [DIP]" "Конденсатор К10-17Б М47 X.X.xФ  NP0 5% [DIP 5мм]" 7351.5,3312.1 r0 top locked
C505 "Конденсатор SMD 10пФ 100В X7R 10% [0805]" C0805#2 7733.4,1843.6 r180 top locked
C506 "Конденсатор К10-17Б М47 33пФ  NP0 5% [DIP]" "Конденсатор К10-17Б М47 X.X.xФ  NP0 5% [DIP 5мм]" 9375.1,3209.7 r0 top locked
C507 "Конденсатор К10-17Б М47 47пФ  NP0 5% [DIP]" "Конденсатор К10-17Б М47 X.X.xФ  NP0 5% [DIP 5мм]" 9375.1,3048.3 r180 top locked
C508 "Конденсатор SMD 0,068мкФ 100В X7R 10% [0805]" C0805#1 9149.6,1694.4 r90 top locked
C509 "Конденсатор SMD 5600пФ 100В X7R 10% [0805]" C0805#1 8468.5,1328.2 r0 top locked
C510 "Конденсатор SMD 0,068мкФ 100В X7R 10% [0805]" C0805#2 9153.5,895.2 r270 top locked
C511 "Конденсатор SMD 100пФ 100В X7R 10% [0805]" C0805#1 8791.3,1245.6 r0 top locked
C512 "Конденсатор SMD 10пФ 100В X7R 10% [0805]" C0805#1 10267.7,2769.2 r180 top locked
C513 "Конденсатор SMD 51пФ 100В X7R 10% [0805]" C0805#1 10267.7,2143.2 r0 top locked
C514 "Конденсатор SMD 1500пФ 100В X7R 10% [0805]" C0805#1 11287.4,2592 r180 top locked
C515 "Конденсатор SMD 100пФ 100В X7R 10% [0805]" C0805#1 10724.4,2355.8 r0 top locked
C516 "Конденсатор SMD 10пФ 100В X7R 10% [0805]" C0805#1 10724.4,2438.5 r0 top locked
C517 "Конденсатор SMD 240пФ 100В X7R 10% [0805]" C0805#1 11362.2,2926.7 r180 top locked
C518 "Конденсатор SMD 33пФ 100В X7R 10% [0805]" C0805#1 10185,2993.6 r270 top locked
C519 "Конденсатор SMD 1500пФ 100В X7R 10% [0805]" C0805#2 10641.7,3147.1 r90 top locked
C520 "Конденсатор SMD 5600пФ 100В X7R 10% [0805]" C0805#3 7799.2,1607.8 r90 top locked
C601 "Конденсатор К10-17Б М47 6,8пФ  NP0 5% [DIP]" "Конденсатор К10-17Б М47 X.X.xФ  NP0 5% [DIP 5мм]" 7547.2,4619.6 r180 top locked
C602 "Конденсатор К10-17Б М47 10пФ  NP0 5% [DIP]" "Конденсатор К10-17Б М47 X.X.xФ  NP0 5% [DIP 5мм]" 7716.5,4466 r270 top locked
C603 "Конденсатор SMD 15пФ 100В X7R 10% [0805]" C0805#1 7566.9,4206.2 r180 top locked
C604 "Конденсатор К10-17Б М47 10пФ  NP0 5% [DIP]" "Конденсатор К10-17Б М47 X.X.xФ  NP0 5% [DIP 5мм]" 7763.8,4761.3 r90 top locked
C605 "Конденсатор К10-17Б М47 10пФ  NP0 5% [DIP]" "Конденсатор К10-17Б М47 X.X.xФ  NP0 5% [DIP 5мм]" 7917.3,4761.3 r90 top locked
C606 "Конденсатор К10-17Б М47 15пФ  NP0 5% [DIP]" "Конденсатор К10-17Б М47 X.X.xФ  NP0 5% [DIP 5мм]" 8098.4,4620 r180 top
C607 "Конденсатор SMD 0,068мкФ 100В X7R 10% [0805]" C0805#1 9216.5,4092 r270 top locked
C608 "Конденсатор SMD 5600пФ 100В X7R 10% [0805]" C0805#1 8204.7,4190.4 r180 top locked
C609 "Конденсатор SMD 0,068мкФ 100В X7R 10% [0805]" C0805#3 9220.5,4682.6 r90 top locked
C610 "Конденсатор SMD 100пФ 100В X7R 10% [0805]" C0805#2 8622,4115.6 r90 top locked
C611 "Конденсатор SMD 9100пФ 100В X7R 10% [0805]" C0805#1 8618.1,107.5 r0 top locked
C612 "Конденсатор SMD 9100пФ 100В X7R 10% [0805]" C0805#1 8917.3,107.5 r180 top locked
C613 "Конденсатор SMD 0,33мкФ 100В X7R 10% [0805]" C0805#3 6852.6,1036.5 r0 top
C614 "Конденсатор SMD 0,33мкФ 100В X7R 10% [0805]" C0805#3 9338.6,670.5 r0 top locked
C615 "Конденсатор SMD 9100пФ 100В X7R 10% [0805]" C0805#2 7214.9,309.1 r270 top
C616 "Конденсатор SMD 9100пФ 100В X7R 10% [0805]" C0805#2 7403.9,159 r180 top
C617 "Конденсатор SMD 33пФ 100В X7R 10% [0805]" C0805#1 7687.3,389.6 r270 top
C618 "Конденсатор SMD 9100пФ 100В X7R 10% [1206]" C1206 9858.5,635 r270 top locked
C619 "Конденсатор SMD 9100пФ 100В X7R 10% [1206]" C1206 7513.8,1196.5 r270 top
C620 "Конденсатор SMD 680пФ 100В X7R 10% [0805]" C0805#2 7353.9,787.4 r270 top
C621 "Конденсатор SMD 680пФ 100В X7R 10% [0805]" C0805#1 7727.9,786.8 r270 top
C622 "Конденсатор SMD 0,33мкФ 100В X7R 10% [0805]" C0805#2 9815.2,68.1 r180 top locked
C623 "Конденсатор SMD 100нФ В X7R 10% [0805]" C0805#3 7919.2,561.1 r270 top
C624 "Конденсатор SMD 100нФ В X7R 10% [0805]" C0805#1 8000.3,561.9 r270 top
C628 "Конденсатор SMD 51пФ 100В X7R 10% [0805]" C0805#3 11003.9,5700.9 r90 top locked
C629 "Конденсатор SMD 33пФ 100В X7R 10% [0805]" C0805#1 10704.9,5442.3 r270 top locked
C630 "Конденсатор SMD 22пФ 100В X7R 10% [0805]" C0805#1 7405.5,4379.4 r0 top locked
C631 "Конденсатор К10-17Б М47 10пФ  NP0 5% [DIP]" "Конденсатор К10-17Б М47 X.X.xФ  NP0 5% [DIP 5мм]" 7877.9,4123.5 r90 top locked
C701 "ECAP (К50-35), 4.7мкФ, 100В, 105°C, 5x11, p:2мм" CAP-TH_BD5.0-P2.00-D0.8-FD#1 436.8,4957.3 r180 top
C702 "ECAP (К50-35), 4.7мкФ, 100В, 105°C, 5x11, p:2мм" CAP-TH_BD5.0-P2.00-D0.8-FD#2 436.8,5658.1 r0 top
C703 "Конденсатор SMD 1мкФ 100В X7R 10% [0805]" C0805#2 436.8,5303.8 r0 top
C704 "Конденсатор SMD 1мкФ 100В X7R 10% [0805]" C0805#2 436.8,5217.2 r0 top
C705 "Конденсатор SMD 3300пФ 100В X7R 10% [0805]" C0805#2 9472.4,6270.8 r0 top locked
C706 "Конденсатор SMD 0,33мкФ 100В X7R 10% [0805]" C0805#3 9263.8,5820.4 r0 top locked
C707 "Конденсатор SMD 0,33мкФ 100В X7R 10% [0805]" C0805#3 9263.8,5899.1 r0 top locked
C708 "Конденсатор SMD 0,33мкФ 100В X7R 10% [0805]" C0805#3 9263.8,5977.8 r0 top locked
C709 "Конденсатор SMD 0,33мкФ 100В X7R 10% [0805]" C0805#3 9263.8,6056.6 r0 top locked
C710 "Конденсатор SMD 0,33мкФ 100В X7R 10% [0805]" C0805#3 9263.8,6135.3 r0 top locked
C711 "Конденсатор SMD 0,33мкФ 100В X7R 10% [0805]" C0805#3 9102.3,5820.4 r180 top locked
C712 "Конденсатор SMD 0,33мкФ 100В X7R 10% [0805]" C0805#3 9102.3,5899.1 r180 top locked
C713 "Конденсатор SMD 0,33мкФ 100В X7R 10% [0805]" C0805#3 9102.3,5977.8 r180 top locked
C714 "Конденсатор SMD 0,33мкФ 100В X7R 10% [0805]" C0805#3 9102.3,6056.6 r180 top locked
C715 "Конденсатор SMD 0,33мкФ 100В X7R 10% [0805]" C0805#3 9102.3,6135.3 r180 top locked
C716 "ECAP (К50-35), 4.7мкФ, 100В, 105°C, 5x11, p:2мм" CAP-TH_BD5.0-P2.00-D0.8-FD#3 9555.1,5607.8 r90 top locked
C717 "Конденсатор SMD 0,33мкФ 100В X7R 10% [0805]" C0805#2 8921.2,6135.3 r0 top locked
C718 "Конденсатор SMD 0,33мкФ 100В X7R 10% [0805]" C0805#2 8921.2,6056.6 r0 top locked
C719 "Конденсатор SMD 0,33мкФ 100В X7R 10% [0805]" C0805#2 8921.2,5977.8 r0 top locked
C720 "Конденсатор SMD 0,33мкФ 100В X7R 10% [0805]" C0805#2 8921.2,5899.1 r0 top locked
C721 "Конденсатор SMD 0,33мкФ 100В X7R 10% [0805]" C0805#2 8921.2,5820.4 r0 top locked
C722 "Конденсатор SMD 0,33мкФ 100В X7R 10% [0805]" C0805#2 8921.2,5741.6 r0 top locked
C723 "Конденсатор SMD 0,33мкФ 100В X7R 10% [0805]" C0805#2 8921.2,5662.9 r0 top locked
C724 "Конденсатор SMD 0,33мкФ 100В X7R 10% [0805]" C0805#2 8921.2,5584.1 r0 top locked
C725 "Конденсатор SMD 0,33мкФ 100В X7R 10% [0805]" C0805#2 8921.2,5505.4 r0 top locked
C726 "Конденсатор SMD 0,33мкФ 100В X7R 10% [0805]" C0805#2 8921.2,5426.7 r0 top locked
C727 "Конденсатор SMD 0,33мкФ 100В X7R 10% [0805]" C0805#1 8755.1,5426.7 r180 top locked
C728 "Конденсатор SMD 0,33мкФ 100В X7R 10% [0805]" C0805#1 8754.3,5505.4 r180 top locked
C729 "Конденсатор SMD 0,33мкФ 100В X7R 10% [0805]" C0805#1 8755.1,5584.1 r180 top locked
C730 "Конденсатор SMD 0,33мкФ 100В X7R 10% [0805]" C0805#1 8755.1,5662.9 r180 top locked
C731 "Конденсатор SMD 0,33мкФ 100В X7R 10% [0805]" C0805#1 8755.9,5741.6 r180 top locked
C732 "Конденсатор SMD 0,33мкФ 100В X7R 10% [0805]" C0805#1 8755.9,5820.4 r180 top locked
C733 "Конденсатор SMD 0,33мкФ 100В X7R 10% [0805]" C0805#1 8755.9,5899.1 r180 top locked
C734 "Конденсатор SMD 0,33мкФ 100В X7R 10% [0805]" C0805#1 8755.9,5977.8 r180 top locked
C735 "Конденсатор SMD 0,33мкФ 100В X7R 10% [0805]" C0805#1 8755.9,6056.6 r180 top locked
C736 "Конденсатор SMD 0,33мкФ 100В X7R 10% [0805]" C0805#1 8755.9,6135.3 r180 top locked
C737 "Конденсатор SMD 2,2мкФ 100В X7R 10% [0805]" C0805#1 8220.5,6485.7 r90 top locked
C738 "Конденсатор SMD 240пФ 100В X7R 10% [0805]" C0805#3 7929.1,6481.8 r90 top locked
C739 "Конденсатор SMD 680пФ 100В X7R 10% [0805]" C0805#3 7551.2,6481.8 r90 top locked
DA201 "Источник опорного напряжения AD587KNZ [DIP-8]" PDIP-8_L9.3-W6.4-P2.54-LS7.9-BL-1 6570.8,4031.3 r90 top locked
DA202 "Стабилизатор напряжения 78L06-300 [SOT-89]" SOT-89-3_L4.5-W2.5-P1.50-LS4.2-BR 10181.1,4395.2 r90 top locked
DA203 "Источник опопрного напряжения 4.096 V ADR434 [SOIC-8]" SOIC-8_L4.9-W3.9-P1.27-LS6.0-BL#1 10389.7,4706.2 r0 top locked
DA204 "Коммутатор аналоговых сигналов ADG431BRZ [SOIC-16]" SOIC-16_L9.9-W3.9-P1.27-LS6.0-BL 6570.8,4909.2 r90 top locked
DA205 "Цифроаналоговый преобразователь AD5531BRUZ [TSSOP-16]" TSSOP-16_L5.0-W4.4-P0.65-LS6.4-BL 6204.7,5098.2 r90 top locked
DA206 "Коммутатор аналоговых сигналов ADG433BRZ [SOIC-16]" SOIC-16_L9.9-W3.9-P1.27-LS6.0-BL 6200.8,4594.3 r90 top locked
DA207 "Операционный усилитель ADA4627-1BRZ [SOIC-8]" SOIC-8_L5.0-W4.0-P1.27-LS6.1-BL 6200.8,4208.4 r90 top locked
DA209 "Операционный усилитель AD8031 [SOIC-8]" SOIC-8_L4.9-W3.9-P1.27-LS6.0-BL#1 10881.9,4328.2 r270 top locked
DA210 "Дифференциальный драйвер 18-разрядных АЦП ADA4941-1YRZ [SOIC-8]" SOIC-8_L4.9-W3.9-P1.27-LS6.0-BL#1 10482.2,4046.7 r0 top locked
DA211 "Дифференциальный АЦП АD7691 [MSOP-10]" MSOP-10_L3.0-W3.0-P0.50-LS4.9-TL 11214.5,4055.4 r0 top locked
DA212 "Логическая функция 2И 74HC08D,653 [SO-14]" SOIC-14_L8.7-W3.9-P1.27-LS6.0-BL 11726.4,4035.7 r180 top locked
DA301 "Операционный усилитель PA340CC [TH]" PA340CC 3486.4,4115 r0 top locked
DA501 "Операционный усилитель TLV9152IDR [SOIC-8]" SOIC-8_L4.9-W3.9-P1.27-LS6.0-BL#2 8472.4,1588.1 r270 top locked
DA502 "Операционный усилитель ADA4627-1BRZ [SOIC-8]" SOIC-8_L5.0-W4.0-P1.27-LS6.1-BL 10267.7,2375.5 r270 top locked
DA503 "Коммутатор аналоговых сигналов ADG433BRZ [SOIC-16]" SOIC-16_L9.9-W3.9-P1.27-LS6.0-BL 11015.7,2399.1 r0 top locked
DA504 "Операционный усилитель ADA4627-1BRZ [SOIC-8]" SOIC-8_L5.0-W4.0-P1.27-LS6.1-BL 10413.4,2993.6 r0 top locked
DA505 "Коммутатор аналоговых сигналов ADG431BRZ [SOIC-16]" SOIC-16_L9.9-W3.9-P1.27-LS6.0-BL 10885.8,2993.6 r0 top locked
DA506 "Операционный усилитель  TLV9151IDCKR [SC-70-5]" SC-70-5_L2.1-W1.3-P0.65-LS2.2-BR 7696.8,1607.8 r270 top locked
DA601 "Операционный усилитель TLV9152IDR [SOIC-8]" SOIC-8_L4.9-W3.9-P1.27-LS6.0-BL#1 8204.7,4336.1 r90 top locked
DA602 "Операционный усилитель AD629BN [DIP-8]" PDIP-8_L9.6-W6.4-P2.54-LS7.6-BL-1 8614.2,4733.7 r0 top locked
DA603 "Операционный усилитель AD8512ARZ [SOIC-8]" SOIC-8_L4.9-W3.9-P1.27-LS6.0-BL#1 8316.9,5540.8 r180 top locked
DA604 "Операционный усилитель AD8271 [MSOP-10]" MSOP-10_L3.0-W3.0-P0.50-LS5.0-BL 8494.1,5540.3 r0 top locked
DA605 "Цифроаналоговый преобразователь AD5300BRTZ [SOT-23-6]" SOT-23-6_L2.9-W1.6-P0.95-LS2.8-BL#1 6662.6,961.5 r0 top
DA606 "Операционный усилитель AD8672ARZ [SOIC-8]" SOIC-8_L4.9-W3.9-P1.27-LS6.0-BL#1 8768.8,342.6 r270 top locked
DA607 "Операционный усилитель AD8672ARZ [SOIC-8]" SOIC-8_L4.9-W3.9-P1.27-LS6.0-BL#2 7411.7,389.6 r270 top
DA608 "Компаратор КР554СА3А [DIP-8]" DIP-8_L9.7-W6.4-P2.54-LS7.6-BL-1 9496.3,333.5 r180 top locked
DA609 "Компаратор КР554СА3А [DIP-8]" DIP-8_L9.7-W6.4-P2.54-LS7.6-BL-1 9909.7,333.5 r180 top locked
DA610 "Операционный усилитель ADA4627-1BRZ [SOIC-8]" SOIC-8_L5.0-W4.0-P1.27-LS6.1-BL 7503.5,786.8 r180 top
DA611 "Операционный усилитель ADA4627-1BRZ [SOIC-8]" SOIC-8_L5.0-W4.0-P1.27-LS6.1-BL 7129.5,787.1 r180 top
DA612 "Коммутатор аналоговых сигналов ADG433BRZ [SOIC-16]" SOIC-16_L9.9-W3.9-P1.27-LS6.0-BL 11208.6,5328.2 r90 top locked
DA613 "Операционный усилитель ADA4627-1BRZ [SOIC-8]" SOIC-8_L5.0-W4.0-P1.27-LS6.1-BL 10944.9,5437.1 r180 top locked
DA701 "Операционный усилитель AD8671ARZ [SOIC-8]" SOIC-8_L4.9-W3.9-P1.27-LS6.0-BL#2 8074.8,6485.7 r0 top locked
DD101 "Изолированный приемопередатчик ADM2486BRWZ-REEL [SOIC-16]" SOIC-16_L10.3-W7.5-P1.27-LS10.3-BL#1 12405.1,1685.5 r0 top locked
DD102 "Изолированный приемопередатчик ADM2486BRWZ-REEL [SOIC-16]" SOIC-16_L10.3-W7.5-P1.27-LS10.3-BL#2 12405.1,2277.1 r0 top locked
DD103 "Высокоскоростной цифровой изолятор ADUM1100BRZ-RL7 [SOIC-8]" SOIC-8_L4.9-W3.9-P1.27-LS6.0-BL#1 12310.8,3404.4 r0 top locked
DD104 "Высокоскоростной цифровой изолятор ADUM1100BRZ-RL7 [SOIC-8]" SOIC-8_L4.9-W3.9-P1.27-LS6.0-BL#2 12306.9,3069.2 r0 top locked
DD105 "Высокоскоростной цифровой изолятор ADUM1100BRZ-RL7 [SOIC-8]" SOIC-8_L4.9-W3.9-P1.27-LS6.0-BL#2 12310.9,2730.6 r0 top locked
DD106 "Изолированный приемопередатчик ADM2486BRWZ-REEL [SOIC-16]" SOIC-16_L10.3-W7.5-P1.27-LS10.3-BL#3 12405.6,3890.3 r0 top locked
DD107 "Изолированный приемопередатчик ADM2486BRWZ-REEL [SOIC-16]" SOIC-16_L10.3-W7.5-P1.27-LS10.3-BL#4 12405.5,4489.7 r0 top locked
DD108 "Изолированный приемопередатчик ADM2486BRWZ-REEL [SOIC-16]" SOIC-16_L10.3-W7.5-P1.27-LS10.3-BL#5 12409.4,5099.9 r0 top locked
DD109 "Высокоскоростной цифровой изолятор ADUM1100BRZ-RL7 [SOIC-8]" SOIC-8_L4.9-W3.9-P1.27-LS6.0-BL#2 12311,5548.7 r0 top locked
DD110 "Изолированный приемопередатчик ADM2486BRWZ-REEL [SOIC-16]" SOIC-16_L10.3-W7.5-P1.27-LS10.3-BL#5 12409.4,6044.8 r0 top locked
DD111 "Высокоскоростной цифровой изолятор ADUM1100BRZ-RL7 [SOIC-8]" SOIC-8_L4.9-W3.9-P1.27-LS6.0-BL#2 12310.8,524.9 r0 top locked
DD112 "Высокоскоростной цифровой изолятор ADUM1100BRZ-RL7 [SOIC-8]" SOIC-8_L4.9-W3.9-P1.27-LS6.0-BL#1 12314.7,863.5 r0 top locked
DD113 "Высокоскоростной цифровой изолятор ADUM1100BRZ-RL7 [SOIC-8]" SOIC-8_L4.9-W3.9-P1.27-LS6.0-BL#2 12315.6,1201.6 r0 top locked
DD114 "ПЛИС EPM3128ATC100-10N [TQFP-100]" TQFP-100_L14.0-W14.0-P0.50-LS16.0-BL 11456.7,1092 r0 top locked
FV501 "Разрядник газонаполненный B88069-X8870-B502 (A81-C90X)" "B88069-X8870-B502 (A81-C90X)" 7253,2568 r270 top locked
FV502 "Разрядник газонаполненный B88069-X8870-B502 (A81-C90X)" "B88069-X8870-B502 (A81-C90X)" 8197.9,2568 r270 top locked
K201 "Реле герконовое DIP05-1C90-51L [PCB]" RELAY-TH_STANDEXMEDER_DIP05-1C90-51L 5403.5,4273.2 r270 top locked
K401 "Реле герконовое DIP05-1A72-13L  [PCB]" RELAY-TH_STANDEXMEDER_DIP05-1A72-13L 417.3,2780.7 r270 top locked
K402 "Реле герконовое УШЯИ.685442.092 (2 реле)" ?#1 1070.9,2505.1 r90 top locked
K403 "Реле герконовое DIP05-1A72-13L  [PCB]" RELAY-TH_STANDEXMEDER_DIP05-1A72-13L 1755.9,2780.7 r270 top locked
K404 "Реле герконовое УШЯИ.685442.092 (1 реле)" ?#2 2409.5,2505.1 r90 top locked
K405 "Реле герконовое DIP05-1A72-13L  [PCB]" RELAY-TH_STANDEXMEDER_DIP05-1A72-13L 3086.6,2780.7 r270 top locked
K406 "Реле герконовое DIP05-1A72-13L  [PCB]" RELAY-TH_STANDEXMEDER_DIP05-1A72-13L 3515.7,2780.7 r270 top locked
K407 "Реле герконовое DIP05-1A72-13L  [PCB]" RELAY-TH_STANDEXMEDER_DIP05-1A72-13L 3944.9,2780.7 r270 top locked
K408 "Реле герконовое DIP05-1A72-13L  [PCB]" RELAY-TH_STANDEXMEDER_DIP05-1A72-13L 4374,2780.7 r270 top locked
K409 "Реле герконовое DIP05-1A72-13L  [PCB]" RELAY-TH_STANDEXMEDER_DIP05-1A72-13L 4803.1,2780.7 r270 top locked
K410 "Реле герконовое DIP05-1A72-13L  [PCB]" RELAY-TH_STANDEXMEDER_DIP05-1A72-13L 5232.3,2780.7 r270 top locked
K411 "Реле герконовое DIP05-1A72-13L  [PCB]" RELAY-TH_STANDEXMEDER_DIP05-1A72-13L 5661.4,2780.7 r270 top locked
K412 "Реле герконовое DIP05-1A72-13L  [PCB]" RELAY-TH_STANDEXMEDER_DIP05-1A72-13L 6090.5,2780.7 r270 top locked
K413 "Реле герконовое DIP05-1A72-13L  [PCB]" RELAY-TH_STANDEXMEDER_DIP05-1A72-13L 6519.7,2780.7 r270 top locked
K501 "Реле герконовое DIP05-1A72-13L  [PCB]" RELAY-TH_STANDEXMEDER_DIP05-1A72-13L 8638.9,2544.4 r90 top locked
K502 "Реле герконовое DIP05-1A72-13L  [PCB]" RELAY-TH_STANDEXMEDER_DIP05-1A72-13L 9402.6,2544.4 r90 top locked
K601 "Реле герконовое DIP05-1A72-13L  [PCB]" "Реле герконовое DIP05-1A72-13L  [PCB]" 7778.7,5954.6 r180 top
K602 "Реле герконовое DIP05-1A72-13L  [PCB]" "Реле герконовое DIP05-1A72-13L  [PCB]" 7782.7,5375.9 r180 top
K603 "Реле герконовое DIP05-1C90-51L [PCB]" RELAY-TH_STANDEXMEDER_DIP05-1C90-51L 10074.8,5378 r0 top locked (schematic designator K602)
KT201 "Control point" "CONTROL POINT"#1 10669.2,4745.6 r0 top locked
KT202 "Control point" "CONTROL POINT"#1 6053.1,3974 r180 top locked
KT203 "Control point" "CONTROL POINT"#2 10744.1,3757.4 r0 top locked
KT204 "Control point" "CONTROL POINT"#2 10622,3757.4 r0 top locked
KT301 "Control point" "CONTROL POINT"#1 4001.4,4189.8 r0 top locked
KT302 "Control point" "CONTROL POINT"#1 3622,5489.7 r180 top locked
KT501 "Control point" "CONTROL POINT"#1 8907.9,1627.5 r0 top
KT502 "Control point" "CONTROL POINT"#1 10637.8,2654.7 r0 top locked
KT503 "Control point" "CONTROL POINT"#1 10169.3,3155 r0 top locked
KT601 "Control point" "CONTROL POINT"#1 8314.9,4670.8 r90 top locked
KT602 "Control point" "CONTROL POINT"#1 8992.1,3969.7 r90 top locked
KT604 "Control point" "CONTROL POINT"#1 7686.5,560.5 r0 top
KT605 "Control point" "CONTROL POINT"#1 7169.2,514.4 r0 top
KT606 "Control point" "CONTROL POINT"#3 8081.9,225.6 r180 top
KT607 "Control point" "CONTROL POINT"#1 7837,227.6 r180 top
L1 "Дроссель LQH55DN101M01 [2220]" L2220 9818.9,5907 r270 top locked
P501 "Перемычка" R0805#1 8157.5,1607.8 r180 top locked
P502 "Перемычка" R0805#1 8157.5,1525.1 r180 top locked
P503 "Перемычка" R0805#1 8157.5,1690.4 r180 top locked
P504 "Перемычка" R0805#1 8275.6,1651.1 r270 top locked
P505 "Перемычка" R0805#2 7795.3,1399.1 r0 top locked
P506 "Перемычка" R0805#1 7708.6,1481.8 r0 top locked
P507 "Перемычка" R0805#2 7759.8,1733.8 r180 top locked
PR601 "47кОм" RES-ADJ-TH_3329H 6852.2,866.9 r180 top
R101 "Резистор 100Ом 0,125Вт 1% [0805]" R0805#2 12669.3,1685.5 r270 top locked
R102 "Резистор 12кОм 0,125Вт 1% [0805]" R0805#3 12192.9,1399.1 r0 top locked
R103 "Резистор 100Ом 0,125Вт 1% [0805]" R0805#1 12670.1,2277.1 r270 top locked
R104 "Резистор 12кОм 0,125Вт 1% [0805]" R0805#3 12192.9,1992.6 r0 top locked
R105 "Резистор 100Ом 0,125Вт 1% [0805]" R0805#2 12661.4,3890.3 r270 top locked
R106 "Резистор 12кОм 0,125Вт 1% [0805]" R0805#3 12192.9,3603.8 r0 top locked
R107 "Резистор 100Ом 0,125Вт 1% [0805]" R0805#1 12661.4,4489.7 r270 top locked
R108 "Резистор 12кОм 0,125Вт 1% [0805]" R0805#3 12192.9,4198.3 r0 top locked
R109 "Резистор 100Ом 0,125Вт 1% [0805]" R0805#1 12665.3,5096 r270 top locked
R110 "Резистор 12кОм 0,125Вт 1% [0805]" R0805#1 12196.8,4796.7 r0 top locked
R111 "Резистор 100Ом 0,125Вт 1% [0805]" R0805#1 12661.4,6044.8 r270 top locked
R112 "Резистор 12кОм 0,125Вт 1% [0805]" R0805#1 12196.8,5753.4 r0 top locked
R113 "Резистор 1кОм 0,125Вт 1% [0805]" R0805#1 10548.3,565.6 r180 top locked
R114 "Резистор 1кОм 0,125Вт 1% [0805]" R0805#2 10398.7,565.6 r0 top locked
R115 "Резистор 1кОм 0,125Вт 1% [0805]" R0805#1 10729.4,565.6 r180 top locked
R116 "Резистор 1кОм 0,125Вт 1% [0805]" R0805#1 10930.2,565.6 r180 top locked
R117 "Резистор 100Ом 0,125Вт 1% [0805]" R0805#1 11120.9,1747.9 r270 top locked
R118 "Резистор 100Ом 0,125Вт 1% [0805]" R0805#2 11976.3,265.3 r90 top locked (schematic designator R125)
R119 "Резистор 100Ом 0,125Вт 1% [0805]" R0805#2 11862.1,265.3 r90 top locked (schematic designator R124)
R120 "Резистор 100Ом 0,125Вт 1% [0805]" R0805#2 11748,265.3 r90 top locked (schematic designator R123)
R121 "Резистор 100Ом 0,125Вт 1% [0805]" R0805#2 11633.8,265.3 r90 top locked (schematic designator R122)
R122 "Резистор 100Ом 0,125Вт 1% [0805]" R0805#2 11519.6,265.3 r90 top locked (schematic designator R121)
R123 "Резистор 100Ом 0,125Вт 1% [0805]" R0805#2 11401.5,265.3 r90 top locked (schematic designator R120)
R124 "Резистор 100Ом 0,125Вт 1% [0805]" R0805#2 11287.3,265.3 r90 top locked (schematic designator R119)
R125 "Резистор 100Ом 0,125Вт 1% [0805]" R0805#2 11173.2,265.3 r90 top locked (schematic designator R118)
R126 "Резистор 100Ом 0,125Вт 1% [0805]" R0805#1 5059,4576 r270 top locked
R127 "Резистор 100Ом 0,125Вт 1% [0805]" R0805#1 4986.2,4359.8 r90 top locked
R128 "Резистор 100Ом 0,125Вт 1% [0805]" R0805#2 224.4,2095.7 r90 top locked
R129 "Резистор 100Ом 0,125Вт 1% [0805]" R0805#1 263.8,2209.8 r180 top locked
R130 "Резистор 100Ом 0,125Вт 1% [0805]" R0805#2 448.8,2095.7 r90 top locked
R131 "Резистор 100Ом 0,125Вт 1% [0805]" R0805#3 488.2,2209.8 r180 top locked
R132 "Резистор 100Ом 0,125Вт 1% [0805]" R0805#2 1563,2095.7 r90 top locked
R133 "Резистор 100Ом 0,125Вт 1% [0805]" R0805#1 1602.4,2209.8 r180 top locked
R134 "Резистор 100Ом 0,125Вт 1% [0805]" R0805#2 1791.3,2095.7 r90 top locked
R135 "Резистор 100Ом 0,125Вт 1% [0805]" R0805#3 1830.7,2209.8 r180 top locked
R136 "Резистор 100Ом 0,125Вт 1% [0805]" R0805#2 2897.6,2095.7 r90 top locked
R137 "Резистор 100Ом 0,125Вт 1% [0805]" R0805#3 2937,2209.8 r180 top locked
R138 "Резистор 100Ом 0,125Вт 1% [0805]" R0805#2 3326.8,2095.7 r90 top locked
R139 "Резистор 100Ом 0,125Вт 1% [0805]" R0805#2 3366.1,2209.8 r180 top locked
R140 "Резистор 100Ом 0,125Вт 1% [0805]" R0805#2 3755.9,2095.7 r90 top locked
R141 "Резистор 100Ом 0,125Вт 1% [0805]" R0805#1 3795.3,2209.8 r180 top locked
R142 "Резистор 100Ом 0,125Вт 1% [0805]" R0805#2 4181.1,2095.7 r90 top locked
R143 "Резистор 100Ом 0,125Вт 1% [0805]" R0805#1 4220.5,2209.8 r180 top locked
R144 "Резистор 100Ом 0,125Вт 1% [0805]" R0805#2 4614.2,2095.7 r90 top locked
R145 "Резистор 100Ом 0,125Вт 1% [0805]" R0805#2 4653.5,2209.8 r180 top locked
R146 "Резистор 100Ом 0,125Вт 1% [0805]" R0805#2 5039.4,2095.7 r90 top locked
R147 "Резистор 100Ом 0,125Вт 1% [0805]" R0805#2 5078.7,2209.8 r180 top locked
R148 "Резистор 100Ом 0,125Вт 1% [0805]" R0805#2 5468.5,2095.7 r90 top locked
R149 "Резистор 100Ом 0,125Вт 1% [0805]" R0805#1 5507.9,2209.8 r180 top locked
R150 "Резистор 100Ом 0,125Вт 1% [0805]" R0805#2 5897.6,2095.7 r90 top locked
R151 "Резистор 100Ом 0,125Вт 1% [0805]" R0805#3 5937,2209.8 r180 top locked
R152 "Резистор 100Ом 0,125Вт 1% [0805]" R0805#2 6330.7,2095.7 r90 top locked
R153 "Резистор 100Ом 0,125Вт 1% [0805]" R0805#1 6370.1,2209.8 r180 top locked
R154 "Резистор 100Ом 0,125Вт 1% [0805]" R0805#3 9087.7,2556.2 r90 top locked
R155 "Резистор 100Ом 0,125Вт 1% [0805]" R0805#1 9087.7,2701.9 r270 top locked
R156 "Резистор 100Ом 0,125Вт 1% [0805]" R0805#1 9843.6,2560.1 r90 top locked
R157 "Резистор 100Ом 0,125Вт 1% [0805]" R0805#3 9843.6,2705.8 r270 top locked
R158 "Резистор 100Ом 0,125Вт 1% [0805]" R0805#1 7059,6072.3 r0 top locked
R159 "Резистор 100Ом 0,125Вт 1% [0805]" R0805#2 7173.2,6033 r90 top locked
R160 "Резистор 100Ом 0,125Вт 1% [0805]" R0805#1 7059,5493.6 r0 top locked
R161 "Резистор 100Ом 0,125Вт 1% [0805]" R0805#1 7177.2,5454.2 r90 top locked
R162 "Резистор 100Ом 0,125Вт 1% [0805]" R0805#3 10460.6,5051.3 r0 top locked
R163 "Резистор 100Ом 0,125Вт 1% [0805]" R0805#1 10574.8,5157.6 r270 top locked